# EAGLE board SparkFun_Qwiic_Buzzer-Panel (EAGLE 9.6.2), part 1 of 6
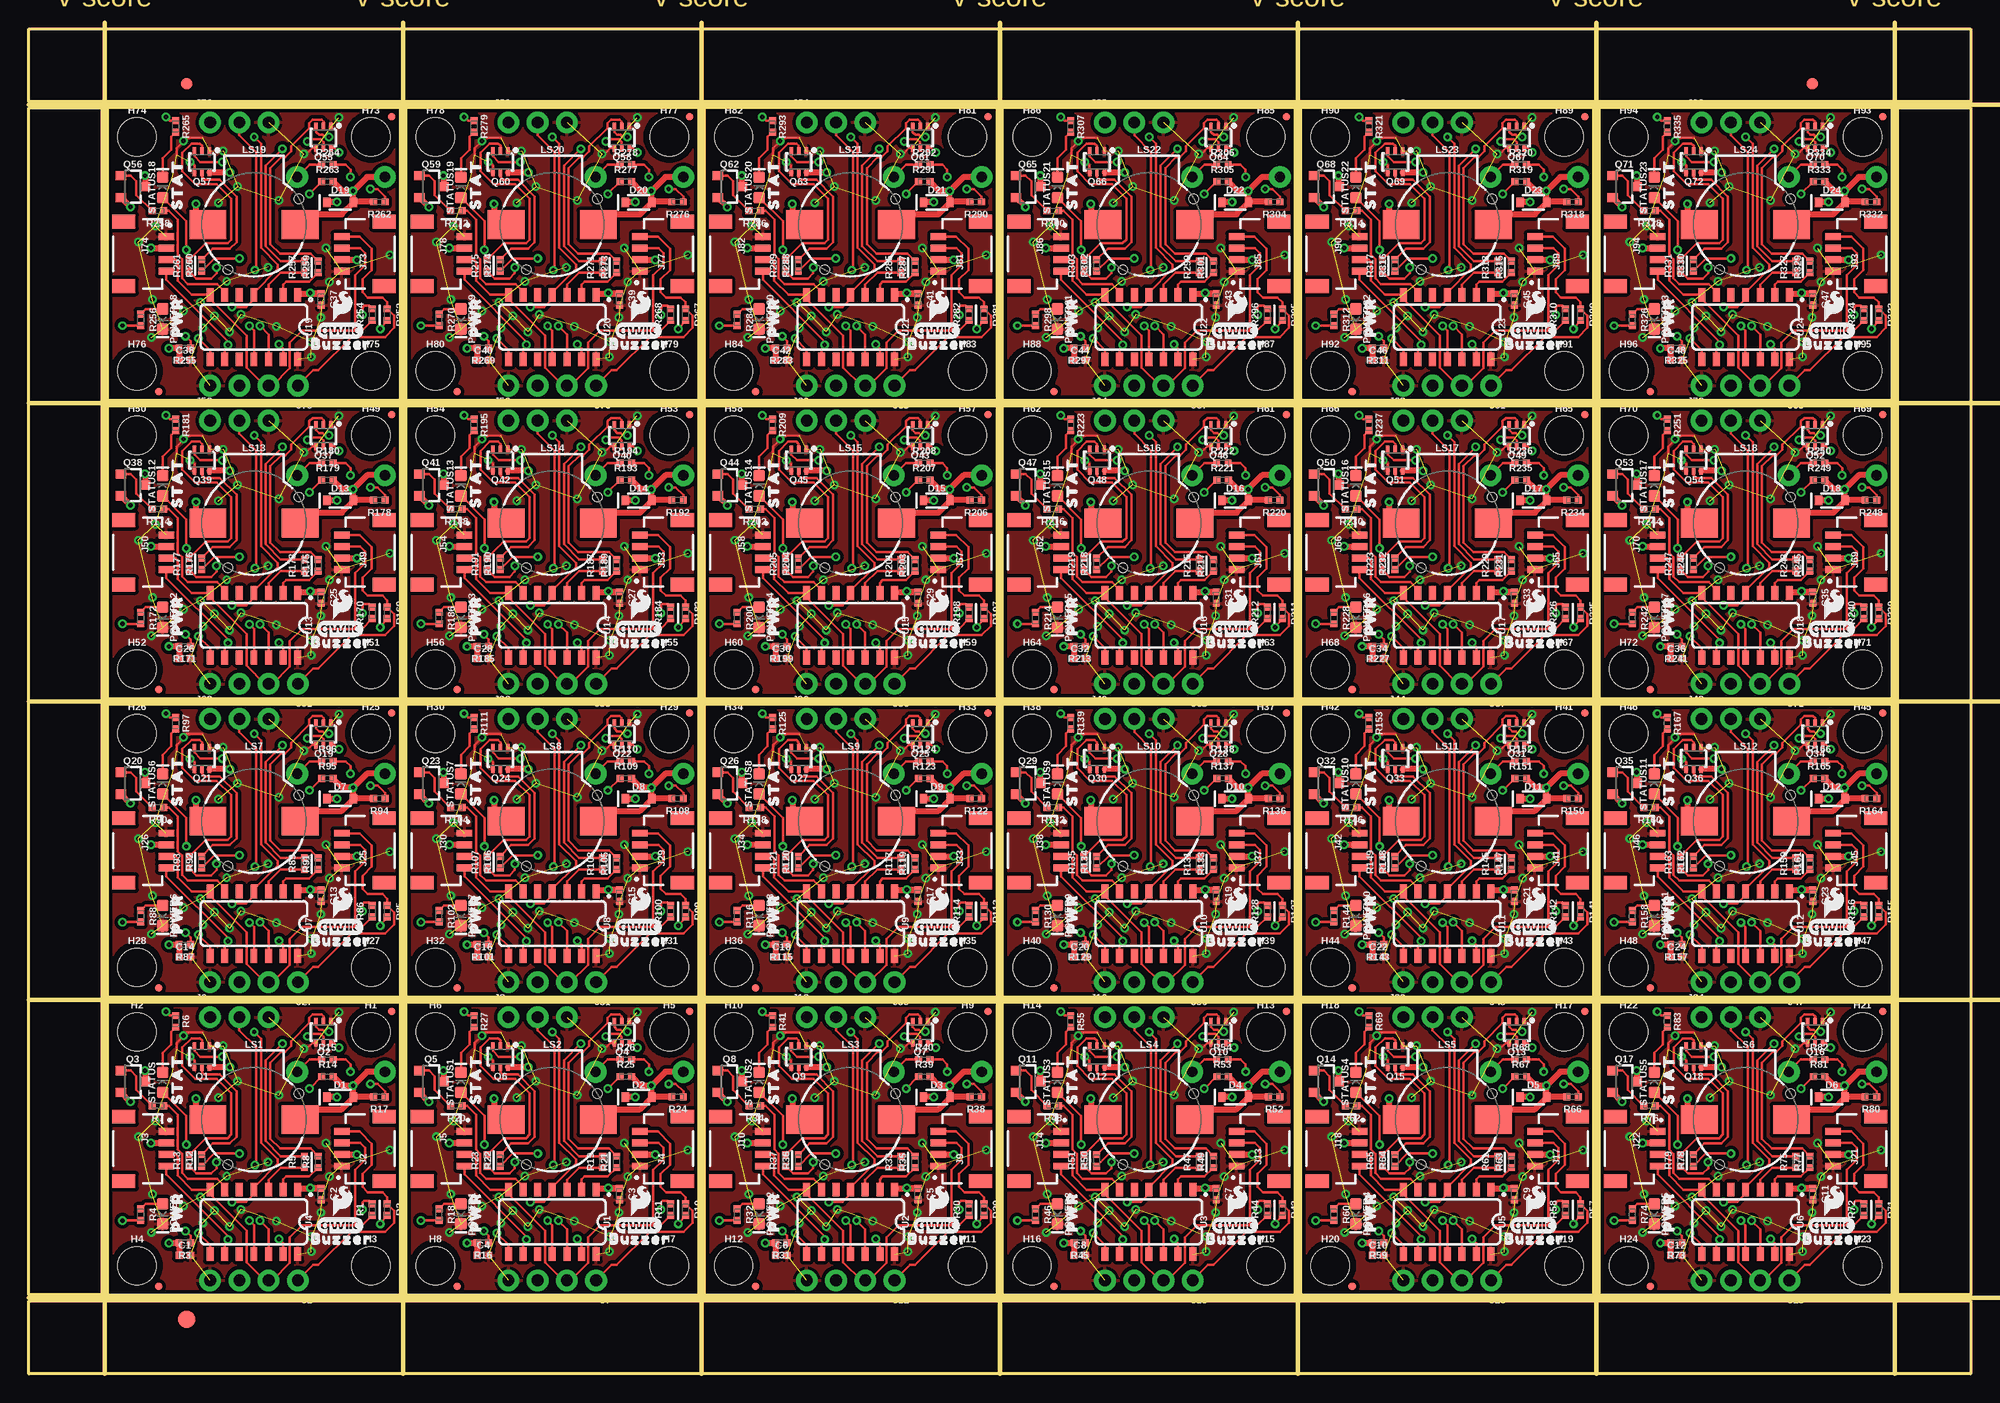
[diagram p0: board, top side]
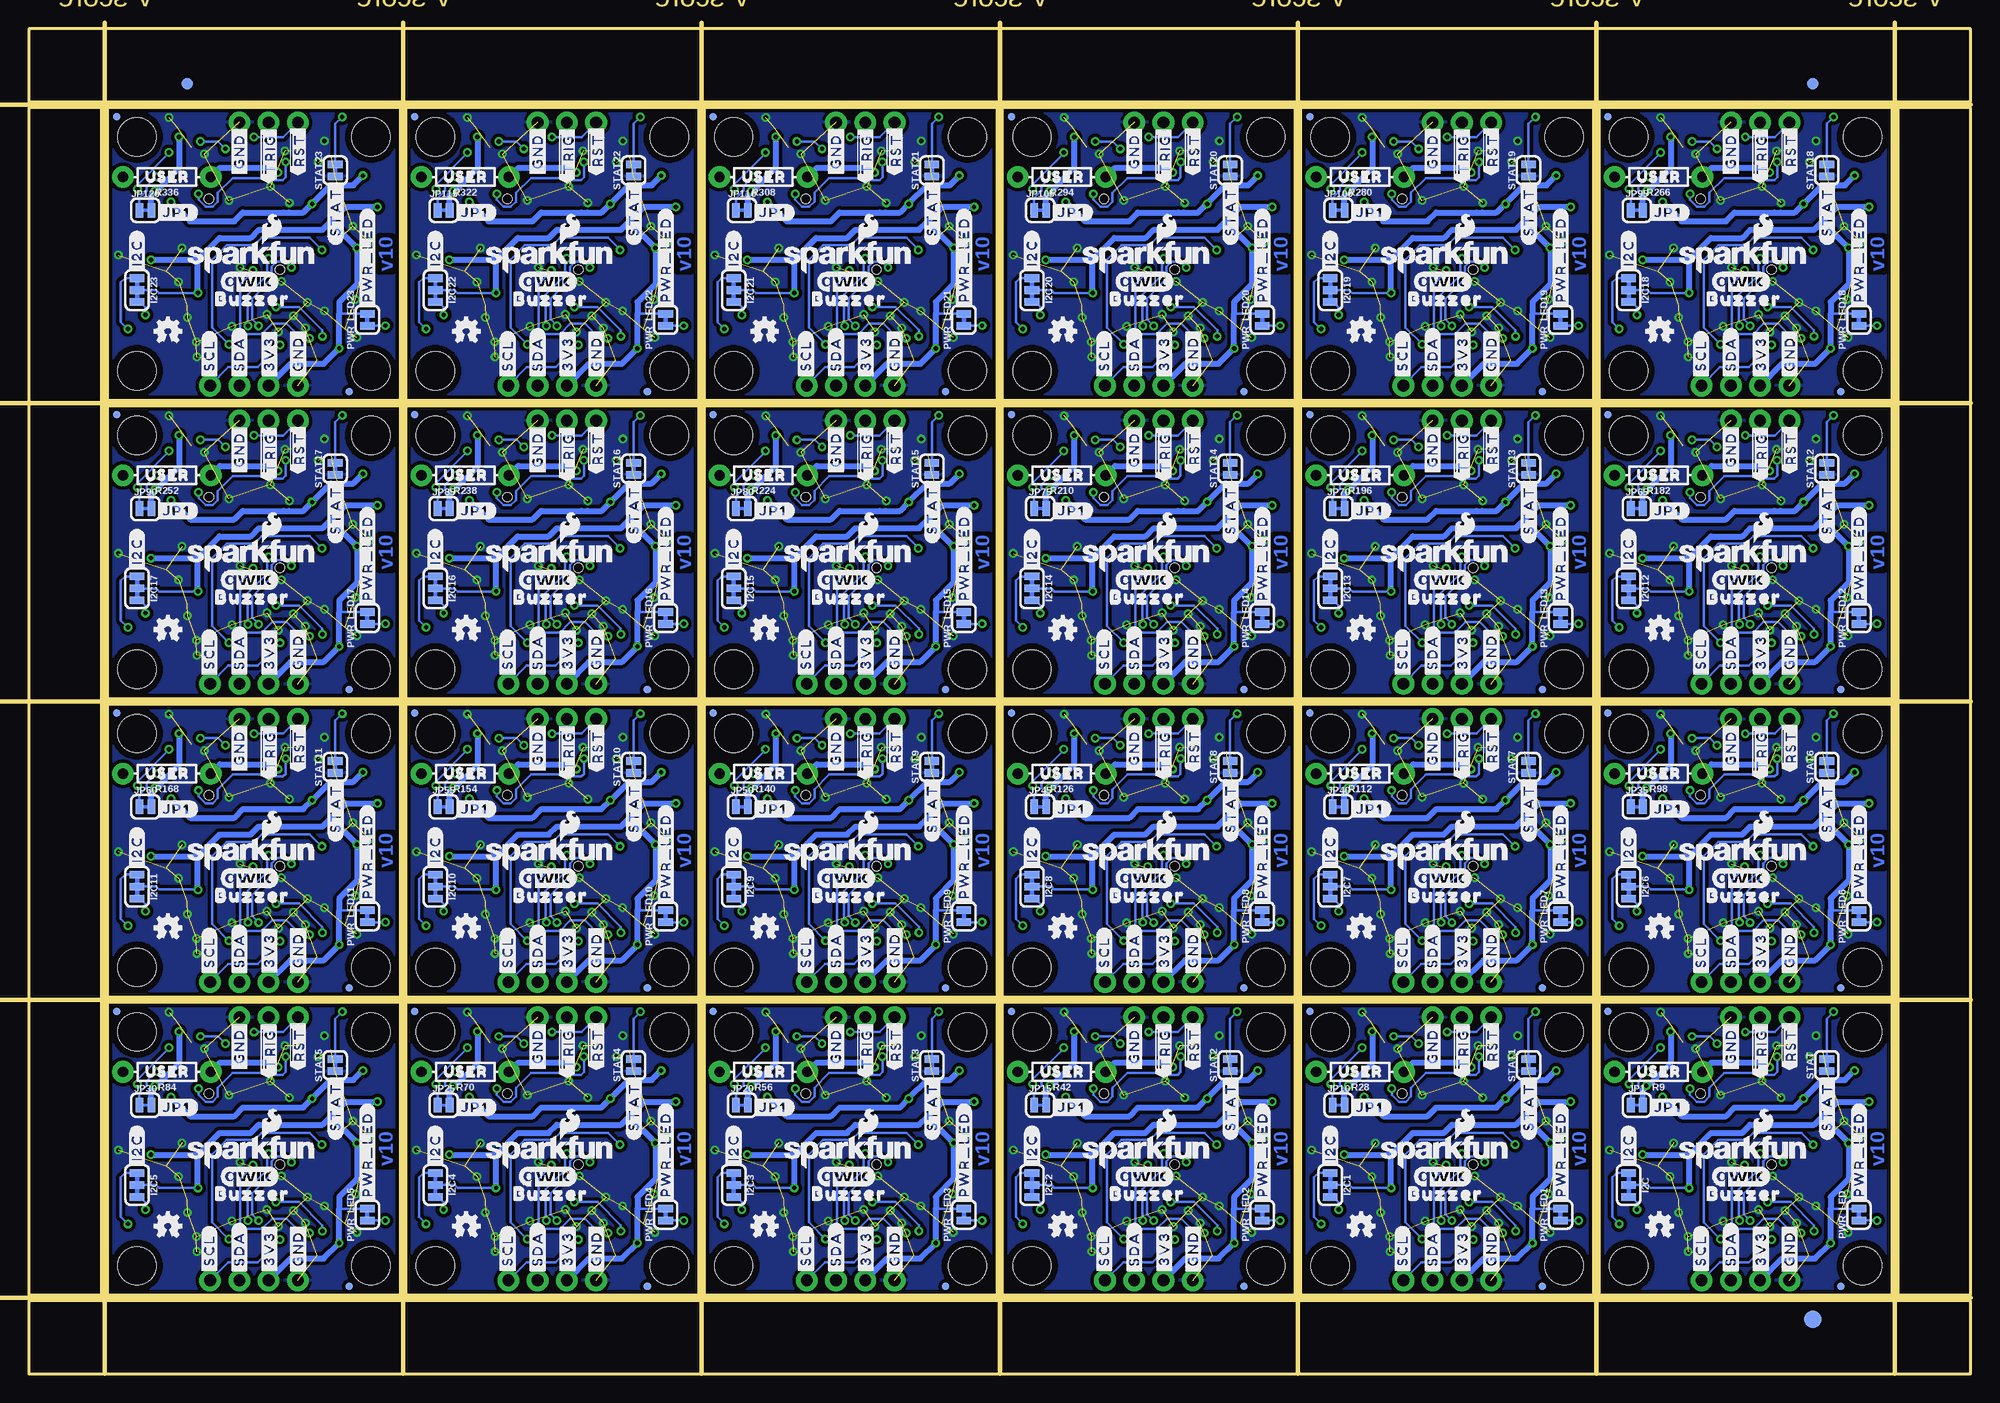
[diagram p1: board, bottom side, seen from below]

Size 168.66 x 116.84 mm. Coordinates in mm from the lower left corner, seen from the top.
Outline: 6.86,6.86 32.26,6.86 32.26,32.26 6.86,32.26 6.86,6.86
Outline: 32.77,6.86 58.17,6.86 58.17,32.26 32.77,32.26 32.77,6.86
Outline: 58.67,6.86 84.07,6.86 84.07,32.26 58.67,32.26 58.67,6.86
Outline: 84.58,6.86 109.98,6.86 109.98,32.26 84.58,32.26 84.58,6.86
Outline: 110.49,6.86 135.89,6.86 135.89,32.26 110.49,32.26 110.49,6.86
Outline: 136.4,6.86 161.8,6.86 161.8,32.26 136.4,32.26 136.4,6.86
Outline: 6.86,32.77 32.26,32.77 32.26,58.17 6.86,58.17 6.86,32.77
Outline: 32.77,32.77 58.17,32.77 58.17,58.17 32.77,58.17 32.77,32.77
Outline: 58.67,32.77 84.07,32.77 84.07,58.17 58.67,58.17 58.67,32.77
Outline: 84.58,32.77 109.98,32.77 109.98,58.17 84.58,58.17 84.58,32.77
Outline: 110.49,32.77 135.89,32.77 135.89,58.17 110.49,58.17 110.49,32.77
Outline: 136.4,32.77 161.8,32.77 161.8,58.17 136.4,58.17 136.4,32.77
Outline: 6.86,58.67 32.26,58.67 32.26,84.07 6.86,84.07 6.86,58.67
Outline: 32.77,58.67 58.17,58.67 58.17,84.07 32.77,84.07 32.77,58.67
Outline: 58.67,58.67 84.07,58.67 84.07,84.07 58.67,84.07 58.67,58.67
Outline: 84.58,58.67 109.98,58.67 109.98,84.07 84.58,84.07 84.58,58.67
Outline: 110.49,58.67 135.89,58.67 135.89,84.07 110.49,84.07 110.49,58.67
Outline: 136.4,58.67 161.8,58.67 161.8,84.07 136.4,84.07 136.4,58.67
Outline: 6.86,84.58 32.26,84.58 32.26,109.98 6.86,109.98 6.86,84.58
Outline: 32.77,84.58 58.17,84.58 58.17,109.98 32.77,109.98 32.77,84.58
Outline: 58.67,84.58 84.07,84.58 84.07,109.98 58.67,109.98 58.67,84.58
Outline: 84.58,84.58 109.98,84.58 109.98,109.98 84.58,109.98 84.58,84.58
Outline: 110.49,84.58 135.89,84.58 135.89,109.98 110.49,109.98 110.49,84.58
Outline: 136.4,84.58 161.8,84.58 161.8,109.98 136.4,109.98 136.4,84.58
Outline: 0,6.35 168.66,6.35 168.66,0 0,0 0,6.35
Outline: 162.31,109.98 168.66,109.98 168.66,6.86 162.31,6.86 162.31,109.98
Outline: 0,116.84 168.66,116.84 168.66,110.49 0,110.49 0,116.84
Outline: 0,109.98 6.35,109.98 6.35,6.86 0,6.86 0,109.98
Copper layers (1*16): Top 0.035mm / dielectric 1.5mm / Bottom 0.035mm
Design rules "SparkFun_Qwiic_Buzzer": minimum track width 7mil, minimum drill 15mil, track to track 7mil, track to pad 7mil, pad to pad 7mil, via to via 7mil, smd to smd 7mil, copper to edge 7mil, drill to drill 7mil, minimum pad ring 7mil, minimum via ring 7mil, stop-mask expansion 4mil, vias tented up to drill 25mil, thermal gap 10mil
Milling: 12 lines

## Footprints (pad centres in the part's own frame; a part is rotated, then mirrored left to right if it is on the bottom)
0402-TIGHT = smd 0.6 x 0.6: 1 -0.5,0; 2 0.5,0
SOD-323 = smd 0.63 x 0.83: A 1.15,0; C -1.15,0
FIDUCIAL-1X2 = smd 1 x 1: 1 0,0
FIDUCIAL-1.5X3 = smd 1.5 x 1.5: 1 0,0
STAND-OFF = hole 3.302: 0,0
SMT-JUMPER_3_2-NC_TRACE_SILK = smd 0.66 x 1.27: 1 -1.041,0; 2 0,0; 3 1.041,0
1X04_NO_SILK = drill 1.016 pad 1.88: 1 0,0; 2 2.54,0; 3 5.08,0; 4 7.62,0
JST04_1MM_RA = smd 0.6 x 1.35: 1 -1.5,0; 2 -0.5,0; 3 0.5,0; 4 1.5,0 | smd 1.2 x 2: NC1 2.8,-3.675; NC2 -2.8,-3.675
1X03_NO_SILK = drill 1.016 pad 1.88: 1 0,0; 2 2.54,0; 3 5.08,0
SMT-JUMPER_2_NC_TRACE_SILK = smd 0.66 x 1.27: 1 -0.521,0; 2 0.521,0
FIDUCIAL-MICRO = smd 0.635 x 0.635: 1 0,0
BUZZER-CCV = smd 3.2 x 2.5: + 4,0; - -4,0 | hole 0.8: -3.9,-2.25; 2.25,3.9
LED-0603 = smd 1 x 1: A -0.877,0; C 0.877,0
SC70-6 = smd 0.3 x 0.66: 1 -0.65,-0.92; 2 0,-0.92; 3 0.65,-0.92; 4 0.65,0.92; 5 0,0.92; 6 -0.65,0.92
SOT23-3 = smd 0.8 x 0.9: 1 -0.95,-1; 2 0.95,-1; 3 0,1.1
AXIAL-0.3 = drill 0.9 pad 1.88: P$1 -3.81,0; P$2 3.81,0
SO14 = smd 0.6 x 1.2: 1 -3.81,-2.8; 2 -2.54,-2.8; 3 -1.27,-2.8; 4 0,-2.8; 5 1.27,-2.8; 6 2.54,-2.8; 7 3.81,-2.8; 8 3.81,2.8; 9 2.54,2.8; 10 1.27,2.8; 11 0,2.8; 12 -1.27,2.8; 13 -2.54,2.8; 14 -3.81,2.8

## Placement (x,y rotation side)
C1  10uF  [0402-TIGHT]  13.55,10.32 0 top
C2  0.1uF  [0402-TIGHT]  25.4,15.62 270 top
C3  0.1uF  [0402-TIGHT]  51.31,15.62 270 top
C4  10uF  [0402-TIGHT]  39.46,10.32 0 top
C5  0.1uF  [0402-TIGHT]  77.22,15.62 270 top
C6  10uF  [0402-TIGHT]  65.36,10.32 0 top
C7  0.1uF  [0402-TIGHT]  103.12,15.62 270 top
C8  10uF  [0402-TIGHT]  91.27,10.32 0 top
C9  0.1uF  [0402-TIGHT]  129.03,15.62 270 top
C10  10uF  [0402-TIGHT]  117.18,10.32 0 top
C11  0.1uF  [0402-TIGHT]  154.94,15.62 270 top
C12  10uF  [0402-TIGHT]  143.09,10.32 0 top
C13  0.1uF  [0402-TIGHT]  25.4,41.53 270 top
C14  10uF  [0402-TIGHT]  13.55,36.23 0 top
C15  0.1uF  [0402-TIGHT]  51.31,41.53 270 top
C16  10uF  [0402-TIGHT]  39.46,36.23 0 top
C17  0.1uF  [0402-TIGHT]  77.22,41.53 270 top
C18  10uF  [0402-TIGHT]  65.36,36.23 0 top
C19  0.1uF  [0402-TIGHT]  103.12,41.53 270 top
C20  10uF  [0402-TIGHT]  91.27,36.23 0 top
C21  0.1uF  [0402-TIGHT]  129.03,41.53 270 top
C22  10uF  [0402-TIGHT]  117.18,36.23 0 top
C23  0.1uF  [0402-TIGHT]  154.94,41.53 270 top
C24  10uF  [0402-TIGHT]  143.09,36.23 0 top
C25  0.1uF  [0402-TIGHT]  25.4,67.44 270 top
C26  10uF  [0402-TIGHT]  13.55,62.14 0 top
C27  0.1uF  [0402-TIGHT]  51.31,67.44 270 top
C28  10uF  [0402-TIGHT]  39.46,62.14 0 top
C29  0.1uF  [0402-TIGHT]  77.22,67.44 270 top
C30  10uF  [0402-TIGHT]  65.36,62.14 0 top
C31  0.1uF  [0402-TIGHT]  103.12,67.44 270 top
C32  10uF  [0402-TIGHT]  91.27,62.14 0 top
C33  0.1uF  [0402-TIGHT]  129.03,67.44 270 top
C34  10uF  [0402-TIGHT]  117.18,62.14 0 top
C35  0.1uF  [0402-TIGHT]  154.94,67.44 270 top
C36  10uF  [0402-TIGHT]  143.09,62.14 0 top
C37  0.1uF  [0402-TIGHT]  25.4,93.34 270 top
C38  10uF  [0402-TIGHT]  13.55,88.05 0 top
C39  0.1uF  [0402-TIGHT]  51.31,93.34 270 top
C40  10uF  [0402-TIGHT]  39.46,88.05 0 top
C41  0.1uF  [0402-TIGHT]  77.22,93.34 270 top
C42  10uF  [0402-TIGHT]  65.36,88.05 0 top
C43  0.1uF  [0402-TIGHT]  103.12,93.34 270 top
C44  10uF  [0402-TIGHT]  91.27,88.05 0 top
C45  0.1uF  [0402-TIGHT]  129.03,93.34 270 top
C46  10uF  [0402-TIGHT]  117.18,88.05 0 top
C47  0.1uF  [0402-TIGHT]  154.94,93.34 270 top
C48  10uF  [0402-TIGHT]  143.09,88.05 0 top
D1  0.5A/40V/420mV  [SOD-323]  27.05,24.05 0 top
D2  0.5A/40V/420mV  [SOD-323]  52.95,24.05 0 top
D3  0.5A/40V/420mV  [SOD-323]  78.86,24.05 0 top
D4  0.5A/40V/420mV  [SOD-323]  104.77,24.05 0 top
D5  0.5A/40V/420mV  [SOD-323]  130.68,24.05 0 top
D6  0.5A/40V/420mV  [SOD-323]  156.59,24.05 0 top
D7  0.5A/40V/420mV  [SOD-323]  27.05,49.96 0 top
D8  0.5A/40V/420mV  [SOD-323]  52.95,49.96 0 top
D9  0.5A/40V/420mV  [SOD-323]  78.86,49.96 0 top
D10  0.5A/40V/420mV  [SOD-323]  104.77,49.96 0 top
D11  0.5A/40V/420mV  [SOD-323]  130.68,49.96 0 top
D12  0.5A/40V/420mV  [SOD-323]  156.59,49.96 0 top
D13  0.5A/40V/420mV  [SOD-323]  27.05,75.86 0 top
D14  0.5A/40V/420mV  [SOD-323]  52.95,75.86 0 top
D15  0.5A/40V/420mV  [SOD-323]  78.86,75.86 0 top
D16  0.5A/40V/420mV  [SOD-323]  104.77,75.86 0 top
D17  0.5A/40V/420mV  [SOD-323]  130.68,75.86 0 top
D18  0.5A/40V/420mV  [SOD-323]  156.59,75.86 0 top
D19  0.5A/40V/420mV  [SOD-323]  27.05,101.77 0 top
D20  0.5A/40V/420mV  [SOD-323]  52.95,101.77 0 top
D21  0.5A/40V/420mV  [SOD-323]  78.86,101.77 0 top
D22  0.5A/40V/420mV  [SOD-323]  104.77,101.77 0 top
D23  0.5A/40V/420mV  [SOD-323]  130.68,101.77 0 top
D24  0.5A/40V/420mV  [SOD-323]  156.59,101.77 0 top
E$1  [FIDUCIAL-1X2]  13.72,112.08 0 top
E$2  [FIDUCIAL-1X2]  13.72,112.08 0 bottom
E$3  [FIDUCIAL-1X2]  154.88,112.08 0 top
E$4  [FIDUCIAL-1X2]  154.88,112.08 0 bottom
E$5  [FIDUCIAL-1.5X3]  13.72,4.76 0 top
E$6  [FIDUCIAL-1.5X3]  13.72,4.76 0 bottom
H1  STAND-OFF  [STAND-OFF]  29.72,29.72 0 top
H2  STAND-OFF  [STAND-OFF]  9.4,29.72 0 top
H3  STAND-OFF  [STAND-OFF]  29.72,9.4 0 top
H4  STAND-OFF  [STAND-OFF]  9.4,9.4 0 top
H5  STAND-OFF  [STAND-OFF]  55.63,29.72 0 top
H6  STAND-OFF  [STAND-OFF]  35.31,29.72 0 top
H7  STAND-OFF  [STAND-OFF]  55.63,9.4 0 top
H8  STAND-OFF  [STAND-OFF]  35.31,9.4 0 top
H9  STAND-OFF  [STAND-OFF]  81.53,29.72 0 top
H10  STAND-OFF  [STAND-OFF]  61.21,29.72 0 top
H11  STAND-OFF  [STAND-OFF]  81.53,9.4 0 top
H12  STAND-OFF  [STAND-OFF]  61.21,9.4 0 top
H13  STAND-OFF  [STAND-OFF]  107.44,29.72 0 top
H14  STAND-OFF  [STAND-OFF]  87.12,29.72 0 top
H15  STAND-OFF  [STAND-OFF]  107.44,9.4 0 top
H16  STAND-OFF  [STAND-OFF]  87.12,9.4 0 top
H17  STAND-OFF  [STAND-OFF]  133.35,29.72 0 top
H18  STAND-OFF  [STAND-OFF]  113.03,29.72 0 top
H19  STAND-OFF  [STAND-OFF]  133.35,9.4 0 top
H20  STAND-OFF  [STAND-OFF]  113.03,9.4 0 top
H21  STAND-OFF  [STAND-OFF]  159.26,29.72 0 top
H22  STAND-OFF  [STAND-OFF]  138.94,29.72 0 top
H23  STAND-OFF  [STAND-OFF]  159.26,9.4 0 top
H24  STAND-OFF  [STAND-OFF]  138.94,9.4 0 top
H25  STAND-OFF  [STAND-OFF]  29.72,55.63 0 top
H26  STAND-OFF  [STAND-OFF]  9.4,55.63 0 top
H27  STAND-OFF  [STAND-OFF]  29.72,35.31 0 top
H28  STAND-OFF  [STAND-OFF]  9.4,35.31 0 top
H29  STAND-OFF  [STAND-OFF]  55.63,55.63 0 top
H30  STAND-OFF  [STAND-OFF]  35.31,55.63 0 top
H31  STAND-OFF  [STAND-OFF]  55.63,35.31 0 top
H32  STAND-OFF  [STAND-OFF]  35.31,35.31 0 top
H33  STAND-OFF  [STAND-OFF]  81.53,55.63 0 top
H34  STAND-OFF  [STAND-OFF]  61.21,55.63 0 top
H35  STAND-OFF  [STAND-OFF]  81.53,35.31 0 top
H36  STAND-OFF  [STAND-OFF]  61.21,35.31 0 top
H37  STAND-OFF  [STAND-OFF]  107.44,55.63 0 top
H38  STAND-OFF  [STAND-OFF]  87.12,55.63 0 top
H39  STAND-OFF  [STAND-OFF]  107.44,35.31 0 top
H40  STAND-OFF  [STAND-OFF]  87.12,35.31 0 top
H41  STAND-OFF  [STAND-OFF]  133.35,55.63 0 top
H42  STAND-OFF  [STAND-OFF]  113.03,55.63 0 top
H43  STAND-OFF  [STAND-OFF]  133.35,35.31 0 top
H44  STAND-OFF  [STAND-OFF]  113.03,35.31 0 top
H45  STAND-OFF  [STAND-OFF]  159.26,55.63 0 top
H46  STAND-OFF  [STAND-OFF]  138.94,55.63 0 top
H47  STAND-OFF  [STAND-OFF]  159.26,35.31 0 top
H48  STAND-OFF  [STAND-OFF]  138.94,35.31 0 top
H49  STAND-OFF  [STAND-OFF]  29.72,81.53 0 top
H50  STAND-OFF  [STAND-OFF]  9.4,81.53 0 top
H51  STAND-OFF  [STAND-OFF]  29.72,61.21 0 top
H52  STAND-OFF  [STAND-OFF]  9.4,61.21 0 top
H53  STAND-OFF  [STAND-OFF]  55.63,81.53 0 top
H54  STAND-OFF  [STAND-OFF]  35.31,81.53 0 top
H55  STAND-OFF  [STAND-OFF]  55.63,61.21 0 top
H56  STAND-OFF  [STAND-OFF]  35.31,61.21 0 top
H57  STAND-OFF  [STAND-OFF]  81.53,81.53 0 top
H58  STAND-OFF  [STAND-OFF]  61.21,81.53 0 top
H59  STAND-OFF  [STAND-OFF]  81.53,61.21 0 top
H60  STAND-OFF  [STAND-OFF]  61.21,61.21 0 top
H61  STAND-OFF  [STAND-OFF]  107.44,81.53 0 top
H62  STAND-OFF  [STAND-OFF]  87.12,81.53 0 top
H63  STAND-OFF  [STAND-OFF]  107.44,61.21 0 top
H64  STAND-OFF  [STAND-OFF]  87.12,61.21 0 top
H65  STAND-OFF  [STAND-OFF]  133.35,81.53 0 top
H66  STAND-OFF  [STAND-OFF]  113.03,81.53 0 top
H67  STAND-OFF  [STAND-OFF]  133.35,61.21 0 top
H68  STAND-OFF  [STAND-OFF]  113.03,61.21 0 top
H69  STAND-OFF  [STAND-OFF]  159.26,81.53 0 top
H70  STAND-OFF  [STAND-OFF]  138.94,81.53 0 top
H71  STAND-OFF  [STAND-OFF]  159.26,61.21 0 top
H72  STAND-OFF  [STAND-OFF]  138.94,61.21 0 top
H73  STAND-OFF  [STAND-OFF]  29.72,107.44 0 top
H74  STAND-OFF  [STAND-OFF]  9.4,107.44 0 top
H75  STAND-OFF  [STAND-OFF]  29.72,87.12 0 top
H76  STAND-OFF  [STAND-OFF]  9.4,87.12 0 top
H77  STAND-OFF  [STAND-OFF]  55.63,107.44 0 top
H78  STAND-OFF  [STAND-OFF]  35.31,107.44 0 top
H79  STAND-OFF  [STAND-OFF]  55.63,87.12 0 top
H80  STAND-OFF  [STAND-OFF]  35.31,87.12 0 top
H81  STAND-OFF  [STAND-OFF]  81.53,107.44 0 top
H82  STAND-OFF  [STAND-OFF]  61.21,107.44 0 top
H83  STAND-OFF  [STAND-OFF]  81.53,87.12 0 top
H84  STAND-OFF  [STAND-OFF]  61.21,87.12 0 top
H85  STAND-OFF  [STAND-OFF]  107.44,107.44 0 top
H86  STAND-OFF  [STAND-OFF]  87.12,107.44 0 top
H87  STAND-OFF  [STAND-OFF]  107.44,87.12 0 top
H88  STAND-OFF  [STAND-OFF]  87.12,87.12 0 top
H89  STAND-OFF  [STAND-OFF]  133.35,107.44 0 top
H90  STAND-OFF  [STAND-OFF]  113.03,107.44 0 top
H91  STAND-OFF  [STAND-OFF]  133.35,87.12 0 top
H92  STAND-OFF  [STAND-OFF]  113.03,87.12 0 top
H93  STAND-OFF  [STAND-OFF]  159.26,107.44 0 top
H94  STAND-OFF  [STAND-OFF]  138.94,107.44 0 top
H95  STAND-OFF  [STAND-OFF]  159.26,87.12 0 top
H96  STAND-OFF  [STAND-OFF]  138.94,87.12 0 top
I2C  JUMPER-SMT_3_2-NC_TRACE_SILK  [SMT-JUMPER_3_2-NC_TRACE_SILK]  29.71,16.42 270 bottom
I2C1  JUMPER-SMT_3_2-NC_TRACE_SILK  [SMT-JUMPER_3_2-NC_TRACE_SILK]  55.62,16.42 270 bottom
I2C2  JUMPER-SMT_3_2-NC_TRACE_SILK  [SMT-JUMPER_3_2-NC_TRACE_SILK]  81.52,16.42 270 bottom
I2C3  JUMPER-SMT_3_2-NC_TRACE_SILK  [SMT-JUMPER_3_2-NC_TRACE_SILK]  107.43,16.42 270 bottom
I2C4  JUMPER-SMT_3_2-NC_TRACE_SILK  [SMT-JUMPER_3_2-NC_TRACE_SILK]  133.34,16.42 270 bottom
I2C5  JUMPER-SMT_3_2-NC_TRACE_SILK  [SMT-JUMPER_3_2-NC_TRACE_SILK]  159.25,16.42 270 bottom
I2C6  JUMPER-SMT_3_2-NC_TRACE_SILK  [SMT-JUMPER_3_2-NC_TRACE_SILK]  29.71,42.33 270 bottom
I2C7  JUMPER-SMT_3_2-NC_TRACE_SILK  [SMT-JUMPER_3_2-NC_TRACE_SILK]  55.62,42.33 270 bottom
I2C8  JUMPER-SMT_3_2-NC_TRACE_SILK  [SMT-JUMPER_3_2-NC_TRACE_SILK]  81.52,42.33 270 bottom
I2C9  JUMPER-SMT_3_2-NC_TRACE_SILK  [SMT-JUMPER_3_2-NC_TRACE_SILK]  107.43,42.33 270 bottom
I2C10  JUMPER-SMT_3_2-NC_TRACE_SILK  [SMT-JUMPER_3_2-NC_TRACE_SILK]  133.34,42.33 270 bottom
I2C11  JUMPER-SMT_3_2-NC_TRACE_SILK  [SMT-JUMPER_3_2-NC_TRACE_SILK]  159.25,42.33 270 bottom
I2C12  JUMPER-SMT_3_2-NC_TRACE_SILK  [SMT-JUMPER_3_2-NC_TRACE_SILK]  29.71,68.23 270 bottom
I2C13  JUMPER-SMT_3_2-NC_TRACE_SILK  [SMT-JUMPER_3_2-NC_TRACE_SILK]  55.62,68.23 270 bottom
I2C14  JUMPER-SMT_3_2-NC_TRACE_SILK  [SMT-JUMPER_3_2-NC_TRACE_SILK]  81.52,68.23 270 bottom
I2C15  JUMPER-SMT_3_2-NC_TRACE_SILK  [SMT-JUMPER_3_2-NC_TRACE_SILK]  107.43,68.23 270 bottom
I2C16  JUMPER-SMT_3_2-NC_TRACE_SILK  [SMT-JUMPER_3_2-NC_TRACE_SILK]  133.34,68.23 270 bottom
I2C17  JUMPER-SMT_3_2-NC_TRACE_SILK  [SMT-JUMPER_3_2-NC_TRACE_SILK]  159.25,68.23 270 bottom
I2C18  JUMPER-SMT_3_2-NC_TRACE_SILK  [SMT-JUMPER_3_2-NC_TRACE_SILK]  29.71,94.14 270 bottom
I2C19  JUMPER-SMT_3_2-NC_TRACE_SILK  [SMT-JUMPER_3_2-NC_TRACE_SILK]  55.62,94.14 270 bottom
I2C20  JUMPER-SMT_3_2-NC_TRACE_SILK  [SMT-JUMPER_3_2-NC_TRACE_SILK]  81.52,94.14 270 bottom
I2C21  JUMPER-SMT_3_2-NC_TRACE_SILK  [SMT-JUMPER_3_2-NC_TRACE_SILK]  107.43,94.14 270 bottom
I2C22  JUMPER-SMT_3_2-NC_TRACE_SILK  [SMT-JUMPER_3_2-NC_TRACE_SILK]  133.34,94.14 270 bottom
I2C23  JUMPER-SMT_3_2-NC_TRACE_SILK  [SMT-JUMPER_3_2-NC_TRACE_SILK]  159.25,94.14 270 bottom
J1  [1X04_NO_SILK]  23.37,8.13 180 top
J2  QWIIC_RA  [JST04_1MM_RA]  27.18,19.56 90 top
J3  QWIIC_RA  [JST04_1MM_RA]  11.94,19.56 270 top
J4  QWIIC_RA  [JST04_1MM_RA]  53.09,19.56 90 top
J5  QWIIC_RA  [JST04_1MM_RA]  37.85,19.56 270 top
J6  [1X03_NO_SILK]  15.75,30.99 0 top
J7  [1X04_NO_SILK]  49.28,8.13 180 top
J8  [1X03_NO_SILK]  41.66,30.99 0 top
J9  QWIIC_RA  [JST04_1MM_RA]  78.99,19.56 90 top
J10  QWIIC_RA  [JST04_1MM_RA]  63.75,19.56 270 top
J11  [1X04_NO_SILK]  75.18,8.13 180 top
J12  [1X03_NO_SILK]  67.56,30.99 0 top
J13  QWIIC_RA  [JST04_1MM_RA]  104.9,19.56 90 top
J14  QWIIC_RA  [JST04_1MM_RA]  89.66,19.56 270 top
J15  [1X04_NO_SILK]  101.09,8.13 180 top
J16  [1X03_NO_SILK]  93.47,30.99 0 top
J17  QWIIC_RA  [JST04_1MM_RA]  130.81,19.56 90 top
J18  QWIIC_RA  [JST04_1MM_RA]  115.57,19.56 270 top
J19  [1X04_NO_SILK]  127,8.13 180 top
J20  [1X03_NO_SILK]  119.38,30.99 0 top
J21  QWIIC_RA  [JST04_1MM_RA]  156.72,19.56 90 top
J22  QWIIC_RA  [JST04_1MM_RA]  141.48,19.56 270 top
J23  [1X04_NO_SILK]  152.91,8.13 180 top
J24  [1X03_NO_SILK]  145.29,30.99 0 top
J25  QWIIC_RA  [JST04_1MM_RA]  27.18,45.47 90 top
J26  QWIIC_RA  [JST04_1MM_RA]  11.94,45.47 270 top
J27  [1X04_NO_SILK]  23.37,34.04 180 top
J28  [1X03_NO_SILK]  15.75,56.9 0 top
J29  QWIIC_RA  [JST04_1MM_RA]  53.09,45.47 90 top
J30  QWIIC_RA  [JST04_1MM_RA]  37.85,45.47 270 top
J31  [1X04_NO_SILK]  49.28,34.04 180 top
J32  [1X03_NO_SILK]  41.66,56.9 0 top
J33  QWIIC_RA  [JST04_1MM_RA]  78.99,45.47 90 top
J34  QWIIC_RA  [JST04_1MM_RA]  63.75,45.47 270 top
J35  [1X04_NO_SILK]  75.18,34.04 180 top
J36  [1X03_NO_SILK]  67.56,56.9 0 top
J37  QWIIC_RA  [JST04_1MM_RA]  104.9,45.47 90 top
J38  QWIIC_RA  [JST04_1MM_RA]  89.66,45.47 270 top
J39  [1X04_NO_SILK]  101.09,34.04 180 top
J40  [1X03_NO_SILK]  93.47,56.9 0 top
J41  QWIIC_RA  [JST04_1MM_RA]  130.81,45.47 90 top
J42  QWIIC_RA  [JST04_1MM_RA]  115.57,45.47 270 top
J43  [1X04_NO_SILK]  127,34.04 180 top
J44  [1X03_NO_SILK]  119.38,56.9 0 top
J45  QWIIC_RA  [JST04_1MM_RA]  156.72,45.47 90 top
J46  QWIIC_RA  [JST04_1MM_RA]  141.48,45.47 270 top
J47  [1X04_NO_SILK]  152.91,34.04 180 top
J48  [1X03_NO_SILK]  145.29,56.9 0 top
J49  QWIIC_RA  [JST04_1MM_RA]  27.18,71.37 90 top
J50  QWIIC_RA  [JST04_1MM_RA]  11.94,71.37 270 top
J51  [1X04_NO_SILK]  23.37,59.94 180 top
J52  [1X03_NO_SILK]  15.75,82.8 0 top
J53  QWIIC_RA  [JST04_1MM_RA]  53.09,71.37 90 top
J54  QWIIC_RA  [JST04_1MM_RA]  37.85,71.37 270 top
J55  [1X04_NO_SILK]  49.28,59.94 180 top
J56  [1X03_NO_SILK]  41.66,82.8 0 top
J57  QWIIC_RA  [JST04_1MM_RA]  78.99,71.37 90 top
J58  QWIIC_RA  [JST04_1MM_RA]  63.75,71.37 270 top
J59  [1X04_NO_SILK]  75.18,59.94 180 top
J60  [1X03_NO_SILK]  67.56,82.8 0 top
J61  QWIIC_RA  [JST04_1MM_RA]  104.9,71.37 90 top
J62  QWIIC_RA  [JST04_1MM_RA]  89.66,71.37 270 top
J63  [1X04_NO_SILK]  101.09,59.94 180 top
J64  [1X03_NO_SILK]  93.47,82.8 0 top
J65  QWIIC_RA  [JST04_1MM_RA]  130.81,71.37 90 top
J66  QWIIC_RA  [JST04_1MM_RA]  115.57,71.37 270 top
J67  [1X04_NO_SILK]  127,59.94 180 top
J68  [1X03_NO_SILK]  119.38,82.8 0 top
J69  QWIIC_RA  [JST04_1MM_RA]  156.72,71.37 90 top
J70  QWIIC_RA  [JST04_1MM_RA]  141.48,71.37 270 top
J71  [1X04_NO_SILK]  152.91,59.94 180 top
J72  [1X03_NO_SILK]  145.29,82.8 0 top
J73  QWIIC_RA  [JST04_1MM_RA]  27.18,97.28 90 top
J74  QWIIC_RA  [JST04_1MM_RA]  11.94,97.28 270 top
J75  [1X04_NO_SILK]  23.37,85.85 180 top
J76  [1X03_NO_SILK]  15.75,108.71 0 top
J77  QWIIC_RA  [JST04_1MM_RA]  53.09,97.28 90 top
J78  QWIIC_RA  [JST04_1MM_RA]  37.85,97.28 270 top
J79  [1X04_NO_SILK]  49.28,85.85 180 top
J80  [1X03_NO_SILK]  41.66,108.71 0 top
J81  QWIIC_RA  [JST04_1MM_RA]  78.99,97.28 90 top
J82  QWIIC_RA  [JST04_1MM_RA]  63.75,97.28 270 top
J83  [1X04_NO_SILK]  75.18,85.85 180 top
J84  [1X03_NO_SILK]  67.56,108.71 0 top
J85  QWIIC_RA  [JST04_1MM_RA]  104.9,97.28 90 top
J86  QWIIC_RA  [JST04_1MM_RA]  89.66,97.28 270 top
J87  [1X04_NO_SILK]  101.09,85.85 180 top
J88  [1X03_NO_SILK]  93.47,108.71 0 top
J89  QWIIC_RA  [JST04_1MM_RA]  130.81,97.28 90 top
J90  QWIIC_RA  [JST04_1MM_RA]  115.57,97.28 270 top
J91  [1X04_NO_SILK]  127,85.85 180 top
J92  [1X03_NO_SILK]  119.38,108.71 0 top
J93  QWIIC_RA  [JST04_1MM_RA]  156.72,97.28 90 top
J94  QWIIC_RA  [JST04_1MM_RA]  141.48,97.28 270 top
J95  [1X04_NO_SILK]  152.91,85.85 180 top
J96  [1X03_NO_SILK]  145.29,108.71 0 top
JP1  [SMT-JUMPER_2_NC_TRACE_SILK]  29,23.35 0 bottom
JP2  FIDUCIALUFIDUCIAL  [FIDUCIAL-MICRO]  31.5,31.5 0 bottom
JP3  FIDUCIALUFIDUCIAL  [FIDUCIAL-MICRO]  57.4,31.5 0 bottom
JP4  FIDUCIALUFIDUCIAL  [FIDUCIAL-MICRO]  37.21,7.62 0 bottom
JP5  FIDUCIALUFIDUCIAL  [FIDUCIAL-MICRO]  37.21,7.62 0 top
JP6  FIDUCIALUFIDUCIAL  [FIDUCIAL-MICRO]  11.3,7.62 0 bottom
JP7  FIDUCIALUFIDUCIAL  [FIDUCIAL-MICRO]  57.4,31.5 0 top
JP8  FIDUCIALUFIDUCIAL  [FIDUCIAL-MICRO]  11.3,7.62 0 top
JP9  FIDUCIALUFIDUCIAL  [FIDUCIAL-MICRO]  31.5,31.5 0 top
JP10  [SMT-JUMPER_2_NC_TRACE_SILK]  54.9,23.35 0 bottom
JP11  FIDUCIALUFIDUCIAL  [FIDUCIAL-MICRO]  83.31,31.5 0 bottom
JP12  FIDUCIALUFIDUCIAL  [FIDUCIAL-MICRO]  63.12,7.62 0 bottom
JP13  FIDUCIALUFIDUCIAL  [FIDUCIAL-MICRO]  63.12,7.62 0 top
JP14  FIDUCIALUFIDUCIAL  [FIDUCIAL-MICRO]  83.31,31.5 0 top
JP15  [SMT-JUMPER_2_NC_TRACE_SILK]  80.81,23.35 0 bottom
JP16  FIDUCIALUFIDUCIAL  [FIDUCIAL-MICRO]  109.22,31.5 0 bottom
JP17  FIDUCIALUFIDUCIAL  [FIDUCIAL-MICRO]  89.03,7.62 0 bottom
JP18  FIDUCIALUFIDUCIAL  [FIDUCIAL-MICRO]  89.03,7.62 0 top
JP19  FIDUCIALUFIDUCIAL  [FIDUCIAL-MICRO]  109.22,31.5 0 top
JP20  [SMT-JUMPER_2_NC_TRACE_SILK]  106.72,23.35 0 bottom
JP21  FIDUCIALUFIDUCIAL  [FIDUCIAL-MICRO]  135.13,31.5 0 bottom
JP22  FIDUCIALUFIDUCIAL  [FIDUCIAL-MICRO]  114.94,7.62 0 bottom
JP23  FIDUCIALUFIDUCIAL  [FIDUCIAL-MICRO]  114.94,7.62 0 top
JP24  FIDUCIALUFIDUCIAL  [FIDUCIAL-MICRO]  135.13,31.5 0 top
JP25  [SMT-JUMPER_2_NC_TRACE_SILK]  132.63,23.35 0 bottom
JP26  FIDUCIALUFIDUCIAL  [FIDUCIAL-MICRO]  161.04,31.5 0 bottom
JP27  FIDUCIALUFIDUCIAL  [FIDUCIAL-MICRO]  140.84,7.62 0 bottom
JP28  FIDUCIALUFIDUCIAL  [FIDUCIAL-MICRO]  140.84,7.62 0 top
JP29  FIDUCIALUFIDUCIAL  [FIDUCIAL-MICRO]  161.04,31.5 0 top
JP30  [SMT-JUMPER_2_NC_TRACE_SILK]  158.54,23.35 0 bottom
JP31  FIDUCIALUFIDUCIAL  [FIDUCIAL-MICRO]  31.5,57.4 0 bottom
JP32  FIDUCIALUFIDUCIAL  [FIDUCIAL-MICRO]  11.3,33.53 0 bottom
JP33  FIDUCIALUFIDUCIAL  [FIDUCIAL-MICRO]  11.3,33.53 0 top
JP34  FIDUCIALUFIDUCIAL  [FIDUCIAL-MICRO]  31.5,57.4 0 top
JP35  [SMT-JUMPER_2_NC_TRACE_SILK]  29,49.26 0 bottom
JP36  FIDUCIALUFIDUCIAL  [FIDUCIAL-MICRO]  57.4,57.4 0 bottom
JP37  FIDUCIALUFIDUCIAL  [FIDUCIAL-MICRO]  37.21,33.53 0 bottom
JP38  FIDUCIALUFIDUCIAL  [FIDUCIAL-MICRO]  37.21,33.53 0 top
JP39  FIDUCIALUFIDUCIAL  [FIDUCIAL-MICRO]  57.4,57.4 0 top
JP40  [SMT-JUMPER_2_NC_TRACE_SILK]  54.9,49.26 0 bottom
JP41  FIDUCIALUFIDUCIAL  [FIDUCIAL-MICRO]  83.31,57.4 0 bottom
JP42  FIDUCIALUFIDUCIAL  [FIDUCIAL-MICRO]  63.12,33.53 0 bottom
JP43  FIDUCIALUFIDUCIAL  [FIDUCIAL-MICRO]  63.12,33.53 0 top
JP44  FIDUCIALUFIDUCIAL  [FIDUCIAL-MICRO]  83.31,57.4 0 top
JP45  [SMT-JUMPER_2_NC_TRACE_SILK]  80.81,49.26 0 bottom
JP46  FIDUCIALUFIDUCIAL  [FIDUCIAL-MICRO]  109.22,57.4 0 bottom
JP47  FIDUCIALUFIDUCIAL  [FIDUCIAL-MICRO]  89.03,33.53 0 bottom
JP48  FIDUCIALUFIDUCIAL  [FIDUCIAL-MICRO]  89.03,33.53 0 top
JP49  FIDUCIALUFIDUCIAL  [FIDUCIAL-MICRO]  109.22,57.4 0 top
JP50  [SMT-JUMPER_2_NC_TRACE_SILK]  106.72,49.26 0 bottom
JP51  FIDUCIALUFIDUCIAL  [FIDUCIAL-MICRO]  135.13,57.4 0 bottom
JP52  FIDUCIALUFIDUCIAL  [FIDUCIAL-MICRO]  114.94,33.53 0 bottom
JP53  FIDUCIALUFIDUCIAL  [FIDUCIAL-MICRO]  114.94,33.53 0 top
JP54  FIDUCIALUFIDUCIAL  [FIDUCIAL-MICRO]  135.13,57.4 0 top
JP55  [SMT-JUMPER_2_NC_TRACE_SILK]  132.63,49.26 0 bottom
JP56  FIDUCIALUFIDUCIAL  [FIDUCIAL-MICRO]  161.04,57.4 0 bottom
JP57  FIDUCIALUFIDUCIAL  [FIDUCIAL-MICRO]  140.84,33.53 0 bottom
JP58  FIDUCIALUFIDUCIAL  [FIDUCIAL-MICRO]  140.84,33.53 0 top
JP59  FIDUCIALUFIDUCIAL  [FIDUCIAL-MICRO]  161.04,57.4 0 top
JP60  [SMT-JUMPER_2_NC_TRACE_SILK]  158.54,49.26 0 bottom
JP61  FIDUCIALUFIDUCIAL  [FIDUCIAL-MICRO]  31.5,83.31 0 bottom
JP62  FIDUCIALUFIDUCIAL  [FIDUCIAL-MICRO]  11.3,59.44 0 bottom
JP63  FIDUCIALUFIDUCIAL  [FIDUCIAL-MICRO]  11.3,59.44 0 top
JP64  FIDUCIALUFIDUCIAL  [FIDUCIAL-MICRO]  31.5,83.31 0 top
JP65  [SMT-JUMPER_2_NC_TRACE_SILK]  29,75.17 0 bottom
JP66  FIDUCIALUFIDUCIAL  [FIDUCIAL-MICRO]  57.4,83.31 0 bottom
JP67  FIDUCIALUFIDUCIAL  [FIDUCIAL-MICRO]  37.21,59.44 0 bottom
JP68  FIDUCIALUFIDUCIAL  [FIDUCIAL-MICRO]  37.21,59.44 0 top
JP69  FIDUCIALUFIDUCIAL  [FIDUCIAL-MICRO]  57.4,83.31 0 top
JP70  [SMT-JUMPER_2_NC_TRACE_SILK]  54.9,75.17 0 bottom
JP71  FIDUCIALUFIDUCIAL  [FIDUCIAL-MICRO]  83.31,83.31 0 bottom
JP72  FIDUCIALUFIDUCIAL  [FIDUCIAL-MICRO]  63.12,59.44 0 bottom
JP73  FIDUCIALUFIDUCIAL  [FIDUCIAL-MICRO]  63.12,59.44 0 top
JP74  FIDUCIALUFIDUCIAL  [FIDUCIAL-MICRO]  83.31,83.31 0 top
JP75  [SMT-JUMPER_2_NC_TRACE_SILK]  80.81,75.17 0 bottom
JP76  FIDUCIALUFIDUCIAL  [FIDUCIAL-MICRO]  109.22,83.31 0 bottom
JP77  FIDUCIALUFIDUCIAL  [FIDUCIAL-MICRO]  89.03,59.44 0 bottom
JP78  FIDUCIALUFIDUCIAL  [FIDUCIAL-MICRO]  89.03,59.44 0 top
JP79  FIDUCIALUFIDUCIAL  [FIDUCIAL-MICRO]  109.22,83.31 0 top
JP80  [SMT-JUMPER_2_NC_TRACE_SILK]  106.72,75.17 0 bottom
JP81  FIDUCIALUFIDUCIAL  [FIDUCIAL-MICRO]  135.13,83.31 0 bottom
JP82  FIDUCIALUFIDUCIAL  [FIDUCIAL-MICRO]  114.94,59.44 0 bottom
JP83  FIDUCIALUFIDUCIAL  [FIDUCIAL-MICRO]  114.94,59.44 0 top
JP84  FIDUCIALUFIDUCIAL  [FIDUCIAL-MICRO]  135.13,83.31 0 top
JP85  [SMT-JUMPER_2_NC_TRACE_SILK]  132.63,75.17 0 bottom
JP86  FIDUCIALUFIDUCIAL  [FIDUCIAL-MICRO]  161.04,83.31 0 bottom
JP87  FIDUCIALUFIDUCIAL  [FIDUCIAL-MICRO]  140.84,59.44 0 bottom
JP88  FIDUCIALUFIDUCIAL  [FIDUCIAL-MICRO]  140.84,59.44 0 top
JP89  FIDUCIALUFIDUCIAL  [FIDUCIAL-MICRO]  161.04,83.31 0 top
JP90  [SMT-JUMPER_2_NC_TRACE_SILK]  158.54,75.17 0 bottom
JP91  FIDUCIALUFIDUCIAL  [FIDUCIAL-MICRO]  31.5,109.22 0 bottom
JP92  FIDUCIALUFIDUCIAL  [FIDUCIAL-MICRO]  11.3,85.34 0 bottom
JP93  FIDUCIALUFIDUCIAL  [FIDUCIAL-MICRO]  11.3,85.34 0 top
JP94  FIDUCIALUFIDUCIAL  [FIDUCIAL-MICRO]  31.5,109.22 0 top
JP95  [SMT-JUMPER_2_NC_TRACE_SILK]  29,101.07 0 bottom
JP96  FIDUCIALUFIDUCIAL  [FIDUCIAL-MICRO]  57.4,109.22 0 bottom
JP97  FIDUCIALUFIDUCIAL  [FIDUCIAL-MICRO]  37.21,85.34 0 bottom
JP98  FIDUCIALUFIDUCIAL  [FIDUCIAL-MICRO]  37.21,85.34 0 top
JP99  FIDUCIALUFIDUCIAL  [FIDUCIAL-MICRO]  57.4,109.22 0 top
JP100  [SMT-JUMPER_2_NC_TRACE_SILK]  54.9,101.07 0 bottom
JP101  FIDUCIALUFIDUCIAL  [FIDUCIAL-MICRO]  83.31,109.22 0 bottom
JP102  FIDUCIALUFIDUCIAL  [FIDUCIAL-MICRO]  63.12,85.34 0 bottom
JP103  FIDUCIALUFIDUCIAL  [FIDUCIAL-MICRO]  63.12,85.34 0 top
JP104  FIDUCIALUFIDUCIAL  [FIDUCIAL-MICRO]  83.31,109.22 0 top
JP105  [SMT-JUMPER_2_NC_TRACE_SILK]  80.81,101.07 0 bottom
JP106  FIDUCIALUFIDUCIAL  [FIDUCIAL-MICRO]  109.22,109.22 0 bottom
JP107  FIDUCIALUFIDUCIAL  [FIDUCIAL-MICRO]  89.03,85.34 0 bottom
JP108  FIDUCIALUFIDUCIAL  [FIDUCIAL-MICRO]  89.03,85.34 0 top
JP109  FIDUCIALUFIDUCIAL  [FIDUCIAL-MICRO]  109.22,109.22 0 top
JP110  [SMT-JUMPER_2_NC_TRACE_SILK]  106.72,101.07 0 bottom
JP111  FIDUCIALUFIDUCIAL  [FIDUCIAL-MICRO]  135.13,109.22 0 bottom
JP112  FIDUCIALUFIDUCIAL  [FIDUCIAL-MICRO]  114.94,85.34 0 bottom
JP113  FIDUCIALUFIDUCIAL  [FIDUCIAL-MICRO]  114.94,85.34 0 top
JP114  FIDUCIALUFIDUCIAL  [FIDUCIAL-MICRO]  135.13,109.22 0 top
JP115  [SMT-JUMPER_2_NC_TRACE_SILK]  132.63,101.07 0 bottom
JP116  FIDUCIALUFIDUCIAL  [FIDUCIAL-MICRO]  161.04,109.22 0 bottom
JP117  FIDUCIALUFIDUCIAL  [FIDUCIAL-MICRO]  140.84,85.34 0 bottom
JP118  FIDUCIALUFIDUCIAL  [FIDUCIAL-MICRO]  140.84,85.34 0 top
JP119  FIDUCIALUFIDUCIAL  [FIDUCIAL-MICRO]  161.04,109.22 0 top
JP120  [SMT-JUMPER_2_NC_TRACE_SILK]  158.54,101.07 0 bottom
LOGO1  OSHW-LOGOMINI  [OSHW-LOGO-MINI]  27.03,12.85 0 bottom
LOGO2  SFE_LOGO_NAME_FLAME.1_INCH  [SFE_LOGO_NAME_FLAME_.1]  19.75,19.3 0 bottom
LOGO3  OSHW-LOGOMINI  [OSHW-LOGO-MINI]  52.94,12.85 0 bottom
LOGO4  SFE_LOGO_FLAME.1_INCH  [SFE_LOGO_FLAME_.1]  27.24,15.05 0 top
LOGO5  QWIIC_LOGO_4MM  [QWIIC_4MM]  27.05,12.89 0 top
LOGO6  SFE_LOGO_FLAME.1_INCH  [SFE_LOGO_FLAME_.1]  53.15,15.05 0 top
LOGO7  SFE_LOGO_NAME_FLAME.1_INCH  [SFE_LOGO_NAME_FLAME_.1]  45.66,19.3 0 bottom
LOGO8  QWIIC_LOGO_4MM  [QWIIC_4MM]  52.96,12.89 0 top
LOGO9  OSHW-LOGOMINI  [OSHW-LOGO-MINI]  78.85,12.85 0 bottom
LOGO10  SFE_LOGO_FLAME.1_INCH  [SFE_LOGO_FLAME_.1]  79.06,15.05 0 top
LOGO11  SFE_LOGO_NAME_FLAME.1_INCH  [SFE_LOGO_NAME_FLAME_.1]  71.56,19.3 0 bottom
LOGO12  QWIIC_LOGO_4MM  [QWIIC_4MM]  78.87,12.89 0 top
LOGO13  OSHW-LOGOMINI  [OSHW-LOGO-MINI]  104.76,12.85 0 bottom
LOGO14  SFE_LOGO_FLAME.1_INCH  [SFE_LOGO_FLAME_.1]  104.97,15.05 0 top
LOGO15  SFE_LOGO_NAME_FLAME.1_INCH  [SFE_LOGO_NAME_FLAME_.1]  97.47,19.3 0 bottom
LOGO16  QWIIC_LOGO_4MM  [QWIIC_4MM]  104.78,12.89 0 top
LOGO17  OSHW-LOGOMINI  [OSHW-LOGO-MINI]  130.67,12.85 0 bottom
LOGO18  SFE_LOGO_FLAME.1_INCH  [SFE_LOGO_FLAME_.1]  130.87,15.05 0 top
LOGO19  SFE_LOGO_NAME_FLAME.1_INCH  [SFE_LOGO_NAME_FLAME_.1]  123.38,19.3 0 bottom
LOGO20  QWIIC_LOGO_4MM  [QWIIC_4MM]  130.68,12.89 0 top
LOGO21  OSHW-LOGOMINI  [OSHW-LOGO-MINI]  156.57,12.85 0 bottom
LOGO22  SFE_LOGO_FLAME.1_INCH  [SFE_LOGO_FLAME_.1]  156.78,15.05 0 top
LOGO23  SFE_LOGO_NAME_FLAME.1_INCH  [SFE_LOGO_NAME_FLAME_.1]  149.29,19.3 0 bottom
LOGO24  QWIIC_LOGO_4MM  [QWIIC_4MM]  156.59,12.89 0 top
LOGO25  OSHW-LOGOMINI  [OSHW-LOGO-MINI]  27.03,38.76 0 bottom
LOGO26  SFE_LOGO_FLAME.1_INCH  [SFE_LOGO_FLAME_.1]  27.24,40.96 0 top
LOGO27  SFE_LOGO_NAME_FLAME.1_INCH  [SFE_LOGO_NAME_FLAME_.1]  19.75,45.21 0 bottom
LOGO28  QWIIC_LOGO_4MM  [QWIIC_4MM]  27.05,38.8 0 top
LOGO29  OSHW-LOGOMINI  [OSHW-LOGO-MINI]  52.94,38.76 0 bottom
LOGO30  SFE_LOGO_FLAME.1_INCH  [SFE_LOGO_FLAME_.1]  53.15,40.96 0 top
LOGO31  SFE_LOGO_NAME_FLAME.1_INCH  [SFE_LOGO_NAME_FLAME_.1]  45.66,45.21 0 bottom
LOGO32  QWIIC_LOGO_4MM  [QWIIC_4MM]  52.96,38.8 0 top
LOGO33  OSHW-LOGOMINI  [OSHW-LOGO-MINI]  78.85,38.76 0 bottom
LOGO34  SFE_LOGO_FLAME.1_INCH  [SFE_LOGO_FLAME_.1]  79.06,40.96 0 top
LOGO35  SFE_LOGO_NAME_FLAME.1_INCH  [SFE_LOGO_NAME_FLAME_.1]  71.56,45.21 0 bottom
LOGO36  QWIIC_LOGO_4MM  [QWIIC_4MM]  78.87,38.8 0 top
LOGO37  OSHW-LOGOMINI  [OSHW-LOGO-MINI]  104.76,38.76 0 bottom
LOGO38  SFE_LOGO_FLAME.1_INCH  [SFE_LOGO_FLAME_.1]  104.97,40.96 0 top
LOGO39  SFE_LOGO_NAME_FLAME.1_INCH  [SFE_LOGO_NAME_FLAME_.1]  97.47,45.21 0 bottom
LOGO40  QWIIC_LOGO_4MM  [QWIIC_4MM]  104.78,38.8 0 top
LOGO41  OSHW-LOGOMINI  [OSHW-LOGO-MINI]  130.67,38.76 0 bottom
LOGO42  SFE_LOGO_FLAME.1_INCH  [SFE_LOGO_FLAME_.1]  130.87,40.96 0 top
LOGO43  SFE_LOGO_NAME_FLAME.1_INCH  [SFE_LOGO_NAME_FLAME_.1]  123.38,45.21 0 bottom
LOGO44  QWIIC_LOGO_4MM  [QWIIC_4MM]  130.68,38.8 0 top
LOGO45  OSHW-LOGOMINI  [OSHW-LOGO-MINI]  156.57,38.76 0 bottom
LOGO46  SFE_LOGO_FLAME.1_INCH  [SFE_LOGO_FLAME_.1]  156.78,40.96 0 top
LOGO47  SFE_LOGO_NAME_FLAME.1_INCH  [SFE_LOGO_NAME_FLAME_.1]  149.29,45.21 0 bottom
LOGO48  QWIIC_LOGO_4MM  [QWIIC_4MM]  156.59,38.8 0 top
LOGO49  OSHW-LOGOMINI  [OSHW-LOGO-MINI]  27.03,64.67 0 bottom
LOGO50  SFE_LOGO_FLAME.1_INCH  [SFE_LOGO_FLAME_.1]  27.24,66.87 0 top
LOGO51  SFE_LOGO_NAME_FLAME.1_INCH  [SFE_LOGO_NAME_FLAME_.1]  19.75,71.12 0 bottom
LOGO52  QWIIC_LOGO_4MM  [QWIIC_4MM]  27.05,64.71 0 top
LOGO53  OSHW-LOGOMINI  [OSHW-LOGO-MINI]  52.94,64.67 0 bottom
LOGO54  SFE_LOGO_FLAME.1_INCH  [SFE_LOGO_FLAME_.1]  53.15,66.87 0 top
LOGO55  SFE_LOGO_NAME_FLAME.1_INCH  [SFE_LOGO_NAME_FLAME_.1]  45.66,71.12 0 bottom
LOGO56  QWIIC_LOGO_4MM  [QWIIC_4MM]  52.96,64.71 0 top
LOGO57  OSHW-LOGOMINI  [OSHW-LOGO-MINI]  78.85,64.67 0 bottom
LOGO58  SFE_LOGO_FLAME.1_INCH  [SFE_LOGO_FLAME_.1]  79.06,66.87 0 top
LOGO59  SFE_LOGO_NAME_FLAME.1_INCH  [SFE_LOGO_NAME_FLAME_.1]  71.56,71.12 0 bottom
LOGO60  QWIIC_LOGO_4MM  [QWIIC_4MM]  78.87,64.71 0 top
LOGO61  OSHW-LOGOMINI  [OSHW-LOGO-MINI]  104.76,64.67 0 bottom
LOGO62  SFE_LOGO_FLAME.1_INCH  [SFE_LOGO_FLAME_.1]  104.97,66.87 0 top
LOGO63  SFE_LOGO_NAME_FLAME.1_INCH  [SFE_LOGO_NAME_FLAME_.1]  97.47,71.12 0 bottom
LOGO64  QWIIC_LOGO_4MM  [QWIIC_4MM]  104.78,64.71 0 top
LOGO65  OSHW-LOGOMINI  [OSHW-LOGO-MINI]  130.67,64.67 0 bottom
LOGO66  SFE_LOGO_FLAME.1_INCH  [SFE_LOGO_FLAME_.1]  130.87,66.87 0 top
LOGO67  SFE_LOGO_NAME_FLAME.1_INCH  [SFE_LOGO_NAME_FLAME_.1]  123.38,71.12 0 bottom
LOGO68  QWIIC_LOGO_4MM  [QWIIC_4MM]  130.68,64.71 0 top
LOGO69  OSHW-LOGOMINI  [OSHW-LOGO-MINI]  156.57,64.67 0 bottom
LOGO70  SFE_LOGO_FLAME.1_INCH  [SFE_LOGO_FLAME_.1]  156.78,66.87 0 top
LOGO71  SFE_LOGO_NAME_FLAME.1_INCH  [SFE_LOGO_NAME_FLAME_.1]  149.29,71.12 0 bottom
LOGO72  QWIIC_LOGO_4MM  [QWIIC_4MM]  156.59,64.71 0 top
LOGO73  OSHW-LOGOMINI  [OSHW-LOGO-MINI]  27.03,90.58 0 bottom
LOGO74  SFE_LOGO_FLAME.1_INCH  [SFE_LOGO_FLAME_.1]  27.24,92.77 0 top
LOGO75  SFE_LOGO_NAME_FLAME.1_INCH  [SFE_LOGO_NAME_FLAME_.1]  19.75,97.03 0 bottom
LOGO76  QWIIC_LOGO_4MM  [QWIIC_4MM]  27.05,90.61 0 top
LOGO77  OSHW-LOGOMINI  [OSHW-LOGO-MINI]  52.94,90.58 0 bottom
LOGO78  SFE_LOGO_FLAME.1_INCH  [SFE_LOGO_FLAME_.1]  53.15,92.77 0 top
LOGO79  SFE_LOGO_NAME_FLAME.1_INCH  [SFE_LOGO_NAME_FLAME_.1]  45.66,97.03 0 bottom
LOGO80  QWIIC_LOGO_4MM  [QWIIC_4MM]  52.96,90.61 0 top
LOGO81  OSHW-LOGOMINI  [OSHW-LOGO-MINI]  78.85,90.58 0 bottom
LOGO82  SFE_LOGO_FLAME.1_INCH  [SFE_LOGO_FLAME_.1]  79.06,92.77 0 top
LOGO83  SFE_LOGO_NAME_FLAME.1_INCH  [SFE_LOGO_NAME_FLAME_.1]  71.56,97.03 0 bottom
LOGO84  QWIIC_LOGO_4MM  [QWIIC_4MM]  78.87,90.61 0 top
LOGO85  OSHW-LOGOMINI  [OSHW-LOGO-MINI]  104.76,90.58 0 bottom
LOGO86  SFE_LOGO_FLAME.1_INCH  [SFE_LOGO_FLAME_.1]  104.97,92.77 0 top
LOGO87  SFE_LOGO_NAME_FLAME.1_INCH  [SFE_LOGO_NAME_FLAME_.1]  97.47,97.03 0 bottom
LOGO88  QWIIC_LOGO_4MM  [QWIIC_4MM]  104.78,90.61 0 top
LOGO89  OSHW-LOGOMINI  [OSHW-LOGO-MINI]  130.67,90.58 0 bottom
LOGO90  SFE_LOGO_FLAME.1_INCH  [SFE_LOGO_FLAME_.1]  130.87,92.77 0 top
LOGO91  SFE_LOGO_NAME_FLAME.1_INCH  [SFE_LOGO_NAME_FLAME_.1]  123.38,97.03 0 bottom
LOGO92  QWIIC_LOGO_4MM  [QWIIC_4MM]  130.68,90.61 0 top
LOGO93  OSHW-LOGOMINI  [OSHW-LOGO-MINI]  156.57,90.58 0 bottom
LOGO94  SFE_LOGO_FLAME.1_INCH  [SFE_LOGO_FLAME_.1]  156.78,92.77 0 top
LOGO95  SFE_LOGO_NAME_FLAME.1_INCH  [SFE_LOGO_NAME_FLAME_.1]  149.29,97.03 0 bottom
LOGO96  QWIIC_LOGO_4MM  [QWIIC_4MM]  156.59,90.61 0 top
LS1  BUZZER  [BUZZER-CCV]  19.56,22.1 180 top
LS2  BUZZER  [BUZZER-CCV]  45.47,22.1 180 top
LS3  BUZZER  [BUZZER-CCV]  71.37,22.1 180 top
LS4  BUZZER  [BUZZER-CCV]  97.28,22.1 180 top
LS5  BUZZER  [BUZZER-CCV]  123.19,22.1 180 top
LS6  BUZZER  [BUZZER-CCV]  149.1,22.1 180 top
LS7  BUZZER  [BUZZER-CCV]  19.56,48.01 180 top
LS8  BUZZER  [BUZZER-CCV]  45.47,48.01 180 top
LS9  BUZZER  [BUZZER-CCV]  71.37,48.01 180 top
LS10  BUZZER  [BUZZER-CCV]  97.28,48.01 180 top
LS11  BUZZER  [BUZZER-CCV]  123.19,48.01 180 top
LS12  BUZZER  [BUZZER-CCV]  149.1,48.01 180 top
LS13  BUZZER  [BUZZER-CCV]  19.56,73.91 180 top
LS14  BUZZER  [BUZZER-CCV]  45.47,73.91 180 top
LS15  BUZZER  [BUZZER-CCV]  71.37,73.91 180 top
LS16  BUZZER  [BUZZER-CCV]  97.28,73.91 180 top
LS17  BUZZER  [BUZZER-CCV]  123.19,73.91 180 top
LS18  BUZZER  [BUZZER-CCV]  149.1,73.91 180 top
LS19  BUZZER  [BUZZER-CCV]  19.56,99.82 180 top
LS20  BUZZER  [BUZZER-CCV]  45.47,99.82 180 top
LS21  BUZZER  [BUZZER-CCV]  71.37,99.82 180 top
LS22  BUZZER  [BUZZER-CCV]  97.28,99.82 180 top
LS23  BUZZER  [BUZZER-CCV]  123.19,99.82 180 top
LS24  BUZZER  [BUZZER-CCV]  149.1,99.82 180 top
POWER  Red  [LED-0603]  11.62,13.91 270 top
POWER1  Red  [LED-0603]  37.53,13.91 270 top
POWER2  Red  [LED-0603]  63.44,13.91 270 top
POWER3  Red  [LED-0603]  89.34,13.91 270 top
POWER4  Red  [LED-0603]  115.25,13.91 270 top
POWER5  Red  [LED-0603]  141.16,13.91 270 top
POWER6  Red  [LED-0603]  11.62,39.81 270 top
POWER7  Red  [LED-0603]  37.53,39.81 270 top
POWER8  Red  [LED-0603]  63.44,39.81 270 top
POWER9  Red  [LED-0603]  89.34,39.81 270 top
POWER10  Red  [LED-0603]  115.25,39.81 270 top
POWER11  Red  [LED-0603]  141.16,39.81 270 top
POWER12  Red  [LED-0603]  11.62,65.72 270 top
POWER13  Red  [LED-0603]  37.53,65.72 270 top
POWER14  Red  [LED-0603]  63.44,65.72 270 top
POWER15  Red  [LED-0603]  89.34,65.72 270 top
POWER16  Red  [LED-0603]  115.25,65.72 270 top
POWER17  Red  [LED-0603]  141.16,65.72 270 top
POWER18  Red  [LED-0603]  11.62,91.63 270 top
POWER19  Red  [LED-0603]  37.53,91.63 270 top
POWER20  Red  [LED-0603]  63.44,91.63 270 top
POWER21  Red  [LED-0603]  89.34,91.63 270 top
POWER22  Red  [LED-0603]  115.25,91.63 270 top
POWER23  Red  [LED-0603]  141.16,91.63 270 top
PWR_LED  PWR_LED  [SMT-JUMPER_2_NC_TRACE_SILK]  9.72,13.84 90 bottom
PWR_LED1  PWR_LED  [SMT-JUMPER_2_NC_TRACE_SILK]  35.62,13.84 90 bottom
PWR_LED2  PWR_LED  [SMT-JUMPER_2_NC_TRACE_SILK]  61.53,13.84 90 bottom
PWR_LED3  PWR_LED  [SMT-JUMPER_2_NC_TRACE_SILK]  87.44,13.84 90 bottom
PWR_LED4  PWR_LED  [SMT-JUMPER_2_NC_TRACE_SILK]  113.35,13.84 90 bottom
PWR_LED5  PWR_LED  [SMT-JUMPER_2_NC_TRACE_SILK]  139.26,13.84 90 bottom
PWR_LED6  PWR_LED  [SMT-JUMPER_2_NC_TRACE_SILK]  9.72,39.75 90 bottom
PWR_LED7  PWR_LED  [SMT-JUMPER_2_NC_TRACE_SILK]  35.62,39.75 90 bottom
PWR_LED8  PWR_LED  [SMT-JUMPER_2_NC_TRACE_SILK]  61.53,39.75 90 bottom
PWR_LED9  PWR_LED  [SMT-JUMPER_2_NC_TRACE_SILK]  87.44,39.75 90 bottom
PWR_LED10  PWR_LED  [SMT-JUMPER_2_NC_TRACE_SILK]  113.35,39.75 90 bottom
PWR_LED11  PWR_LED  [SMT-JUMPER_2_NC_TRACE_SILK]  139.26,39.75 90 bottom
PWR_LED12  PWR_LED  [SMT-JUMPER_2_NC_TRACE_SILK]  9.72,65.66 90 bottom
PWR_LED13  PWR_LED  [SMT-JUMPER_2_NC_TRACE_SILK]  35.62,65.66 90 bottom
PWR_LED14  PWR_LED  [SMT-JUMPER_2_NC_TRACE_SILK]  61.53,65.66 90 bottom
PWR_LED15  PWR_LED  [SMT-JUMPER_2_NC_TRACE_SILK]  87.44,65.66 90 bottom
PWR_LED16  PWR_LED  [SMT-JUMPER_2_NC_TRACE_SILK]  113.35,65.66 90 bottom
PWR_LED17  PWR_LED  [SMT-JUMPER_2_NC_TRACE_SILK]  139.26,65.66 90 bottom
PWR_LED18  PWR_LED  [SMT-JUMPER_2_NC_TRACE_SILK]  9.72,91.57 90 bottom
PWR_LED19  PWR_LED  [SMT-JUMPER_2_NC_TRACE_SILK]  35.62,91.57 90 bottom
PWR_LED20  PWR_LED  [SMT-JUMPER_2_NC_TRACE_SILK]  61.53,91.57 90 bottom
PWR_LED21  PWR_LED  [SMT-JUMPER_2_NC_TRACE_SILK]  87.44,91.57 90 bottom
PWR_LED22  PWR_LED  [SMT-JUMPER_2_NC_TRACE_SILK]  113.35,91.57 90 bottom
PWR_LED23  PWR_LED  [SMT-JUMPER_2_NC_TRACE_SILK]  139.26,91.57 90 bottom
Q1  [SC70-6]  15.05,27.56 180 top
Q2  [SC70-6]  25.6,29.69 180 top
Q3  200mA/40V  [SOT23-3]  9.02,25.4 270 top
Q4  [SC70-6]  51.51,29.69 180 top
Q5  200mA/40V  [SOT23-3]  34.92,25.4 270 top
Q6  [SC70-6]  40.96,27.56 180 top
Q7  [SC70-6]  77.41,29.69 180 top
Q8  200mA/40V  [SOT23-3]  60.83,25.4 270 top
Q9  [SC70-6]  66.87,27.56 180 top
Q10  [SC70-6]  103.32,29.69 180 top
Q11  200mA/40V  [SOT23-3]  86.74,25.4 270 top
Q12  [SC70-6]  92.77,27.56 180 top
Q13  [SC70-6]  129.23,29.69 180 top
Q14  200mA/40V  [SOT23-3]  112.65,25.4 270 top
Q15  [SC70-6]  118.68,27.56 180 top
Q16  [SC70-6]  155.14,29.69 180 top
Q17  200mA/40V  [SOT23-3]  138.56,25.4 270 top
Q18  [SC70-6]  144.59,27.56 180 top
Q19  [SC70-6]  25.6,55.6 180 top
Q20  200mA/40V  [SOT23-3]  9.02,51.31 270 top
Q21  [SC70-6]  15.05,53.47 180 top
Q22  [SC70-6]  51.51,55.6 180 top
Q23  200mA/40V  [SOT23-3]  34.92,51.31 270 top
Q24  [SC70-6]  40.96,53.47 180 top
Q25  [SC70-6]  77.41,55.6 180 top
Q26  200mA/40V  [SOT23-3]  60.83,51.31 270 top
Q27  [SC70-6]  66.87,53.47 180 top
Q28  [SC70-6]  103.32,55.6 180 top
Q29  200mA/40V  [SOT23-3]  86.74,51.31 270 top
Q30  [SC70-6]  92.77,53.47 180 top
Q31  [SC70-6]  129.23,55.6 180 top
Q32  200mA/40V  [SOT23-3]  112.65,51.31 270 top
Q33  [SC70-6]  118.68,53.47 180 top
Q34  [SC70-6]  155.14,55.6 180 top
Q35  200mA/40V  [SOT23-3]  138.56,51.31 270 top
Q36  [SC70-6]  144.59,53.47 180 top
Q37  [SC70-6]  25.6,81.5 180 top
Q38  200mA/40V  [SOT23-3]  9.02,77.22 270 top
Q39  [SC70-6]  15.05,79.38 180 top
Q40  [SC70-6]  51.51,81.5 180 top
Q41  200mA/40V  [SOT23-3]  34.92,77.22 270 top
Q42  [SC70-6]  40.96,79.38 180 top
Q43  [SC70-6]  77.41,81.5 180 top
Q44  200mA/40V  [SOT23-3]  60.83,77.22 270 top
Q45  [SC70-6]  66.87,79.38 180 top
Q46  [SC70-6]  103.32,81.5 180 top
Q47  200mA/40V  [SOT23-3]  86.74,77.22 270 top
Q48  [SC70-6]  92.77,79.38 180 top
Q49  [SC70-6]  129.23,81.5 180 top
Q50  200mA/40V  [SOT23-3]  112.65,77.22 270 top
Q51  [SC70-6]  118.68,79.38 180 top
Q52  [SC70-6]  155.14,81.5 180 top
Q53  200mA/40V  [SOT23-3]  138.56,77.22 270 top
Q54  [SC70-6]  144.59,79.38 180 top
Q55  [SC70-6]  25.6,107.41 180 top
Q56  200mA/40V  [SOT23-3]  9.02,103.12 270 top
Q57  [SC70-6]  15.05,105.28 180 top
Q58  [SC70-6]  51.51,107.41 180 top
Q59  200mA/40V  [SOT23-3]  34.92,103.12 270 top
Q60  [SC70-6]  40.96,105.28 180 top
Q61  [SC70-6]  77.41,107.41 180 top
Q62  200mA/40V  [SOT23-3]  60.83,103.12 270 top
Q63  [SC70-6]  66.87,105.28 180 top
Q64  [SC70-6]  103.32,107.41 180 top
Q65  200mA/40V  [SOT23-3]  86.74,103.12 270 top
Q66  [SC70-6]  92.77,105.28 180 top
Q67  [SC70-6]  129.23,107.41 180 top
Q68  200mA/40V  [SOT23-3]  112.65,103.12 270 top
Q69  [SC70-6]  118.68,105.28 180 top
Q70  [SC70-6]  155.14,107.41 180 top
Q71  200mA/40V  [SOT23-3]  138.56,103.12 270 top
Q72  [SC70-6]  144.59,105.28 180 top
R1  2.2k  [0402-TIGHT]  29.83,14.29 90 top
R2  2.2k  [0402-TIGHT]  31.14,14.29 270 top
R3  10k  [0402-TIGHT]  13.55,11.39 180 top
R4  4.7k  [0402-TIGHT]  9.72,13.84 270 top
R5  330  [0402-TIGHT]  23.94,18.42 90 top
R6  2.2k  [0402-TIGHT]  12.77,30.62 270 top
R7  330  [0402-TIGHT]  11.22,23.3 180 top
R8  330  [0402-TIGHT]  25.15,18.42 90 top
R9  USER  [AXIAL-0.3]  27.12,26.24 180 bottom
R10  2.2k  [0402-TIGHT]  57.05,14.29 270 top
R11  2.2k  [0402-TIGHT]  55.74,14.29 90 top
R12  330  [0402-TIGHT]  15.02,18.55 90 top
R13  330  [0402-TIGHT]  13.91,18.55 90 top
R14  330  [0402-TIGHT]  25.95,25.83 0 top
R15  2.2k  [0402-TIGHT]  25.95,27.3 0 top
R16  10k  [0402-TIGHT]  39.45,11.39 180 top
R17  100  [0402-TIGHT]  30.44,24.08 180 top
R18  4.7k  [0402-TIGHT]  35.62,13.84 270 top
R19  330  [0402-TIGHT]  49.85,18.42 90 top
R20  330  [0402-TIGHT]  37.13,23.3 180 top
R21  330  [0402-TIGHT]  51.05,18.42 90 top
R22  330  [0402-TIGHT]  40.92,18.55 90 top
R23  330  [0402-TIGHT]  39.82,18.55 90 top
R24  100  [0402-TIGHT]  56.35,24.08 180 top
R25  330  [0402-TIGHT]  51.86,25.83 0 top
R26  2.2k  [0402-TIGHT]  51.85,27.3 0 top
R27  2.2k  [0402-TIGHT]  38.67,30.62 270 top
R28  USER  [AXIAL-0.3]  53.03,26.24 180 bottom
R29  2.2k  [0402-TIGHT]  82.96,14.29 270 top
R30  2.2k  [0402-TIGHT]  81.65,14.29 90 top
R31  10k  [0402-TIGHT]  65.36,11.39 180 top
R32  4.7k  [0402-TIGHT]  61.53,13.84 270 top
R33  330  [0402-TIGHT]  75.76,18.42 90 top
R34  330  [0402-TIGHT]  63.04,23.3 180 top
R35  330  [0402-TIGHT]  76.96,18.42 90 top
R36  330  [0402-TIGHT]  66.83,18.55 90 top
R37  330  [0402-TIGHT]  65.73,18.55 90 top
R38  100  [0402-TIGHT]  82.26,24.08 180 top
R39  330  [0402-TIGHT]  77.77,25.83 0 top
R40  2.2k  [0402-TIGHT]  77.76,27.3 0 top
R41  2.2k  [0402-TIGHT]  64.58,30.62 270 top
R42  USER  [AXIAL-0.3]  78.94,26.24 180 bottom
R43  2.2k  [0402-TIGHT]  108.86,14.29 270 top
R44  2.2k  [0402-TIGHT]  107.56,14.29 90 top
R45  10k  [0402-TIGHT]  91.27,11.39 180 top
R46  4.7k  [0402-TIGHT]  87.44,13.84 270 top
R47  330  [0402-TIGHT]  101.66,18.42 90 top
R48  330  [0402-TIGHT]  88.95,23.3 180 top
R49  330  [0402-TIGHT]  102.87,18.42 90 top
R50  330  [0402-TIGHT]  92.74,18.55 90 top
R51  330  [0402-TIGHT]  91.64,18.55 90 top
R52  100  [0402-TIGHT]  108.17,24.08 180 top
R53  330  [0402-TIGHT]  103.68,25.83 0 top
R54  2.2k  [0402-TIGHT]  103.67,27.3 0 top
R55  2.2k  [0402-TIGHT]  90.49,30.62 270 top
R56  USER  [AXIAL-0.3]  104.85,26.24 180 bottom
R57  2.2k  [0402-TIGHT]  134.77,14.29 270 top
R58  2.2k  [0402-TIGHT]  133.47,14.29 90 top
R59  10k  [0402-TIGHT]  117.18,11.39 180 top
R60  4.7k  [0402-TIGHT]  113.35,13.84 270 top
R61  330  [0402-TIGHT]  127.57,18.42 90 top
R62  330  [0402-TIGHT]  114.86,23.3 180 top
R63  330  [0402-TIGHT]  128.78,18.42 90 top
R64  330  [0402-TIGHT]  118.65,18.55 90 top
R65  330  [0402-TIGHT]  117.54,18.55 90 top
R66  100  [0402-TIGHT]  134.07,24.08 180 top
R67  330  [0402-TIGHT]  129.58,25.83 0 top
R68  2.2k  [0402-TIGHT]  129.58,27.3 0 top
R69  2.2k  [0402-TIGHT]  116.4,30.62 270 top
R70  USER  [AXIAL-0.3]  130.76,26.24 180 bottom
R71  2.2k  [0402-TIGHT]  160.68,14.29 270 top
R72  2.2k  [0402-TIGHT]  159.37,14.29 90 top
R73  10k  [0402-TIGHT]  143.09,11.39 180 top
R74  4.7k  [0402-TIGHT]  139.26,13.84 270 top
R75  330  [0402-TIGHT]  153.48,18.42 90 top
R76  330  [0402-TIGHT]  140.76,23.3 180 top
R77  330  [0402-TIGHT]  154.69,18.42 90 top
R78  330  [0402-TIGHT]  144.56,18.55 90 top
R79  330  [0402-TIGHT]  143.45,18.55 90 top
R80  100  [0402-TIGHT]  159.98,24.08 180 top
R81  330  [0402-TIGHT]  155.49,25.83 0 top
R82  2.2k  [0402-TIGHT]  155.49,27.3 0 top
R83  2.2k  [0402-TIGHT]  142.31,30.62 270 top
R84  USER  [AXIAL-0.3]  156.66,26.24 180 bottom
R85  2.2k  [0402-TIGHT]  31.14,40.2 270 top
R86  2.2k  [0402-TIGHT]  29.83,40.2 90 top
R87  10k  [0402-TIGHT]  13.55,37.3 180 top
R88  4.7k  [0402-TIGHT]  9.72,39.75 270 top
R89  330  [0402-TIGHT]  23.94,44.33 90 top
R90  330  [0402-TIGHT]  11.22,49.21 180 top
R91  330  [0402-TIGHT]  25.15,44.33 90 top
R92  330  [0402-TIGHT]  15.02,44.46 90 top
R93  330  [0402-TIGHT]  13.91,44.46 90 top
R94  100  [0402-TIGHT]  30.44,49.99 180 top
R95  330  [0402-TIGHT]  25.95,51.73 0 top
R96  2.2k  [0402-TIGHT]  25.95,53.21 0 top
R97  2.2k  [0402-TIGHT]  12.77,56.53 270 top
R98  USER  [AXIAL-0.3]  27.12,52.15 180 bottom
R99  2.2k  [0402-TIGHT]  57.05,40.2 270 top
R100  2.2k  [0402-TIGHT]  55.74,40.2 90 top
R101  10k  [0402-TIGHT]  39.45,37.3 180 top
R102  4.7k  [0402-TIGHT]  35.62,39.75 270 top
R103  330  [0402-TIGHT]  49.85,44.33 90 top
R104  330  [0402-TIGHT]  37.13,49.21 180 top
R105  330  [0402-TIGHT]  51.05,44.33 90 top
R106  330  [0402-TIGHT]  40.92,44.46 90 top
R107  330  [0402-TIGHT]  39.82,44.46 90 top
R108  100  [0402-TIGHT]  56.35,49.99 180 top
R109  330  [0402-TIGHT]  51.86,51.73 0 top
R110  2.2k  [0402-TIGHT]  51.85,53.21 0 top
R111  2.2k  [0402-TIGHT]  38.67,56.53 270 top
R112  USER  [AXIAL-0.3]  53.03,52.15 180 bottom
R113  2.2k  [0402-TIGHT]  82.96,40.2 270 top
R114  2.2k  [0402-TIGHT]  81.65,40.2 90 top
R115  10k  [0402-TIGHT]  65.36,37.3 180 top
R116  4.7k  [0402-TIGHT]  61.53,39.75 270 top
R117  330  [0402-TIGHT]  75.76,44.33 90 top
R118  330  [0402-TIGHT]  63.04,49.21 180 top
R119  330  [0402-TIGHT]  76.96,44.33 90 top
R120  330  [0402-TIGHT]  66.83,44.46 90 top
R121  330  [0402-TIGHT]  65.73,44.46 90 top
R122  100  [0402-TIGHT]  82.26,49.99 180 top
R123  330  [0402-TIGHT]  77.77,51.73 0 top
R124  2.2k  [0402-TIGHT]  77.76,53.21 0 top
R125  2.2k  [0402-TIGHT]  64.58,56.53 270 top
R126  USER  [AXIAL-0.3]  78.94,52.15 180 bottom
R127  2.2k  [0402-TIGHT]  108.86,40.2 270 top
R128  2.2k  [0402-TIGHT]  107.56,40.2 90 top
R129  10k  [0402-TIGHT]  91.27,37.3 180 top
R130  4.7k  [0402-TIGHT]  87.44,39.75 270 top
R131  330  [0402-TIGHT]  101.66,44.33 90 top
R132  330  [0402-TIGHT]  88.95,49.21 180 top
R133  330  [0402-TIGHT]  102.87,44.33 90 top
R134  330  [0402-TIGHT]  92.74,44.46 90 top
R135  330  [0402-TIGHT]  91.64,44.46 90 top
R136  100  [0402-TIGHT]  108.17,49.99 180 top
R137  330  [0402-TIGHT]  103.68,51.73 0 top
R138  2.2k  [0402-TIGHT]  103.67,53.21 0 top
R139  2.2k  [0402-TIGHT]  90.49,56.53 270 top
R140  USER  [AXIAL-0.3]  104.85,52.15 180 bottom
R141  2.2k  [0402-TIGHT]  134.77,40.2 270 top
R142  2.2k  [0402-TIGHT]  133.47,40.2 90 top
R143  10k  [0402-TIGHT]  117.18,37.3 180 top
R144  4.7k  [0402-TIGHT]  113.35,39.75 270 top
R145  330  [0402-TIGHT]  127.57,44.33 90 top
R146  330  [0402-TIGHT]  114.86,49.21 180 top
R147  330  [0402-TIGHT]  128.78,44.33 90 top
R148  330  [0402-TIGHT]  118.65,44.46 90 top
R149  330  [0402-TIGHT]  117.54,44.46 90 top
R150  100  [0402-TIGHT]  134.07,49.99 180 top
R151  330  [0402-TIGHT]  129.58,51.73 0 top
R152  2.2k  [0402-TIGHT]  129.58,53.21 0 top
R153  2.2k  [0402-TIGHT]  116.4,56.53 270 top
R154  USER  [AXIAL-0.3]  130.76,52.15 180 bottom
R155  2.2k  [0402-TIGHT]  160.68,40.2 270 top
R156  2.2k  [0402-TIGHT]  159.37,40.2 90 top
R157  10k  [0402-TIGHT]  143.09,37.3 180 top
R158  4.7k  [0402-TIGHT]  139.26,39.75 270 top
R159  330  [0402-TIGHT]  153.48,44.33 90 top
R160  330  [0402-TIGHT]  140.76,49.21 180 top
R161  330  [0402-TIGHT]  154.69,44.33 90 top
R162  330  [0402-TIGHT]  144.56,44.46 90 top
R163  330  [0402-TIGHT]  143.45,44.46 90 top
R164  100  [0402-TIGHT]  159.98,49.99 180 top
R165  330  [0402-TIGHT]  155.49,51.73 0 top
R166  2.2k  [0402-TIGHT]  155.49,53.21 0 top
R167  2.2k  [0402-TIGHT]  142.31,56.53 270 top
R168  USER  [AXIAL-0.3]  156.66,52.15 180 bottom
R169  2.2k  [0402-TIGHT]  31.14,66.1 270 top
R170  2.2k  [0402-TIGHT]  29.83,66.1 90 top
R171  10k  [0402-TIGHT]  13.55,63.21 180 top
R172  4.7k  [0402-TIGHT]  9.72,65.66 270 top
R173  330  [0402-TIGHT]  23.94,70.24 90 top
R174  330  [0402-TIGHT]  11.22,75.12 180 top
R175  330  [0402-TIGHT]  25.15,70.24 90 top
R176  330  [0402-TIGHT]  15.02,70.37 90 top
R177  330  [0402-TIGHT]  13.91,70.37 90 top
R178  100  [0402-TIGHT]  30.44,75.9 180 top
R179  330  [0402-TIGHT]  25.95,77.64 0 top
R180  2.2k  [0402-TIGHT]  25.95,79.12 0 top
R181  2.2k  [0402-TIGHT]  12.77,82.44 270 top
R182  USER  [AXIAL-0.3]  27.12,78.06 180 bottom
R183  2.2k  [0402-TIGHT]  57.05,66.1 270 top
R184  2.2k  [0402-TIGHT]  55.74,66.1 90 top
R185  10k  [0402-TIGHT]  39.45,63.21 180 top
R186  4.7k  [0402-TIGHT]  35.62,65.66 270 top
R187  330  [0402-TIGHT]  49.85,70.24 90 top
R188  330  [0402-TIGHT]  37.13,75.12 180 top
R189  330  [0402-TIGHT]  51.05,70.24 90 top
R190  330  [0402-TIGHT]  40.92,70.37 90 top
R191  330  [0402-TIGHT]  39.82,70.37 90 top
R192  100  [0402-TIGHT]  56.35,75.9 180 top
R193  330  [0402-TIGHT]  51.86,77.64 0 top
R194  2.2k  [0402-TIGHT]  51.85,79.12 0 top
R195  2.2k  [0402-TIGHT]  38.67,82.44 270 top
R196  USER  [AXIAL-0.3]  53.03,78.06 180 bottom
R197  2.2k  [0402-TIGHT]  82.96,66.1 270 top
R198  2.2k  [0402-TIGHT]  81.65,66.1 90 top
R199  10k  [0402-TIGHT]  65.36,63.21 180 top
R200  4.7k  [0402-TIGHT]  61.53,65.66 270 top
R201  330  [0402-TIGHT]  75.76,70.24 90 top
R202  330  [0402-TIGHT]  63.04,75.12 180 top
R203  330  [0402-TIGHT]  76.96,70.24 90 top
R204  330  [0402-TIGHT]  66.83,70.37 90 top
R205  330  [0402-TIGHT]  65.73,70.37 90 top
R206  100  [0402-TIGHT]  82.26,75.9 180 top
R207  330  [0402-TIGHT]  77.77,77.64 0 top
R208  2.2k  [0402-TIGHT]  77.76,79.12 0 top
R209  2.2k  [0402-TIGHT]  64.58,82.44 270 top
R210  USER  [AXIAL-0.3]  78.94,78.06 180 bottom
R211  2.2k  [0402-TIGHT]  108.86,66.1 270 top
R212  2.2k  [0402-TIGHT]  107.56,66.1 90 top
R213  10k  [0402-TIGHT]  91.27,63.21 180 top
R214  4.7k  [0402-TIGHT]  87.44,65.66 270 top
R215  330  [0402-TIGHT]  101.66,70.24 90 top
R216  330  [0402-TIGHT]  88.95,75.12 180 top
R217  330  [0402-TIGHT]  102.87,70.24 90 top
R218  330  [0402-TIGHT]  92.74,70.37 90 top
R219  330  [0402-TIGHT]  91.64,70.37 90 top
R220  100  [0402-TIGHT]  108.17,75.9 180 top
R221  330  [0402-TIGHT]  103.68,77.64 0 top
R222  2.2k  [0402-TIGHT]  103.67,79.12 0 top
R223  2.2k  [0402-TIGHT]  90.49,82.44 270 top
R224  USER  [AXIAL-0.3]  104.85,78.06 180 bottom
R225  2.2k  [0402-TIGHT]  134.77,66.1 270 top
R226  2.2k  [0402-TIGHT]  133.47,66.1 90 top
R227  10k  [0402-TIGHT]  117.18,63.21 180 top
R228  4.7k  [0402-TIGHT]  113.35,65.66 270 top
R229  330  [0402-TIGHT]  127.57,70.24 90 top
R230  330  [0402-TIGHT]  114.86,75.12 180 top
R231  330  [0402-TIGHT]  128.78,70.24 90 top
R232  330  [0402-TIGHT]  118.65,70.37 90 top
R233  330  [0402-TIGHT]  117.54,70.37 90 top
R234  100  [0402-TIGHT]  134.07,75.9 180 top
R235  330  [0402-TIGHT]  129.58,77.64 0 top
R236  2.2k  [0402-TIGHT]  129.58,79.12 0 top
R237  2.2k  [0402-TIGHT]  116.4,82.44 270 top
R238  USER  [AXIAL-0.3]  130.76,78.06 180 bottom
R239  2.2k  [0402-TIGHT]  160.68,66.1 270 top
R240  2.2k  [0402-TIGHT]  159.37,66.1 90 top
R241  10k  [0402-TIGHT]  143.09,63.21 180 top
R242  4.7k  [0402-TIGHT]  139.26,65.66 270 top
R243  330  [0402-TIGHT]  153.48,70.24 90 top
R244  330  [0402-TIGHT]  140.76,75.12 180 top
R245  330  [0402-TIGHT]  154.69,70.24 90 top
R246  330  [0402-TIGHT]  144.56,70.37 90 top
R247  330  [0402-TIGHT]  143.45,70.37 90 top
R248  100  [0402-TIGHT]  159.98,75.9 180 top
R249  330  [0402-TIGHT]  155.49,77.64 0 top
R250  2.2k  [0402-TIGHT]  155.49,79.12 0 top
R251  2.2k  [0402-TIGHT]  142.31,82.44 270 top
R252  USER  [AXIAL-0.3]  156.66,78.06 180 bottom
R253  2.2k  [0402-TIGHT]  31.14,92.01 270 top
R254  2.2k  [0402-TIGHT]  29.83,92.01 90 top
R255  10k  [0402-TIGHT]  13.55,89.11 180 top
R256  4.7k  [0402-TIGHT]  9.72,91.57 270 top
R257  330  [0402-TIGHT]  23.94,96.15 90 top
R258  330  [0402-TIGHT]  11.22,101.03 180 top
R259  330  [0402-TIGHT]  25.15,96.15 90 top
R260  330  [0402-TIGHT]  15.02,96.27 90 top
R261  330  [0402-TIGHT]  13.91,96.27 90 top
R262  100  [0402-TIGHT]  30.44,101.8 180 top
R263  330  [0402-TIGHT]  25.95,103.55 0 top
R264  2.2k  [0402-TIGHT]  25.95,105.03 0 top
R265  2.2k  [0402-TIGHT]  12.77,108.35 270 top
R266  USER  [AXIAL-0.3]  27.12,103.96 180 bottom
R267  2.2k  [0402-TIGHT]  57.05,92.01 270 top
R268  2.2k  [0402-TIGHT]  55.74,92.01 90 top
R269  10k  [0402-TIGHT]  39.45,89.11 180 top
R270  4.7k  [0402-TIGHT]  35.62,91.57 270 top
R271  330  [0402-TIGHT]  49.85,96.15 90 top
R272  330  [0402-TIGHT]  37.13,101.03 180 top
R273  330  [0402-TIGHT]  51.05,96.15 90 top
R274  330  [0402-TIGHT]  40.92,96.27 90 top
R275  330  [0402-TIGHT]  39.82,96.27 90 top
R276  100  [0402-TIGHT]  56.35,101.8 180 top
R277  330  [0402-TIGHT]  51.86,103.55 0 top